# Altium PCB PCB1.PcbDoc (part 1 of 2)
Units mm, origin at the board's own origin, x right, y up, seen from the top; angles counter-clockwise.
Board outline 68.25 x 71.75 mm, 4 copper layers (Top Layer, Int1 (GND), Int2 (PWR), Bottom Layer), stack 1.369 mm thick; 58 components, 47 nets, 216 pads, 101 vias.
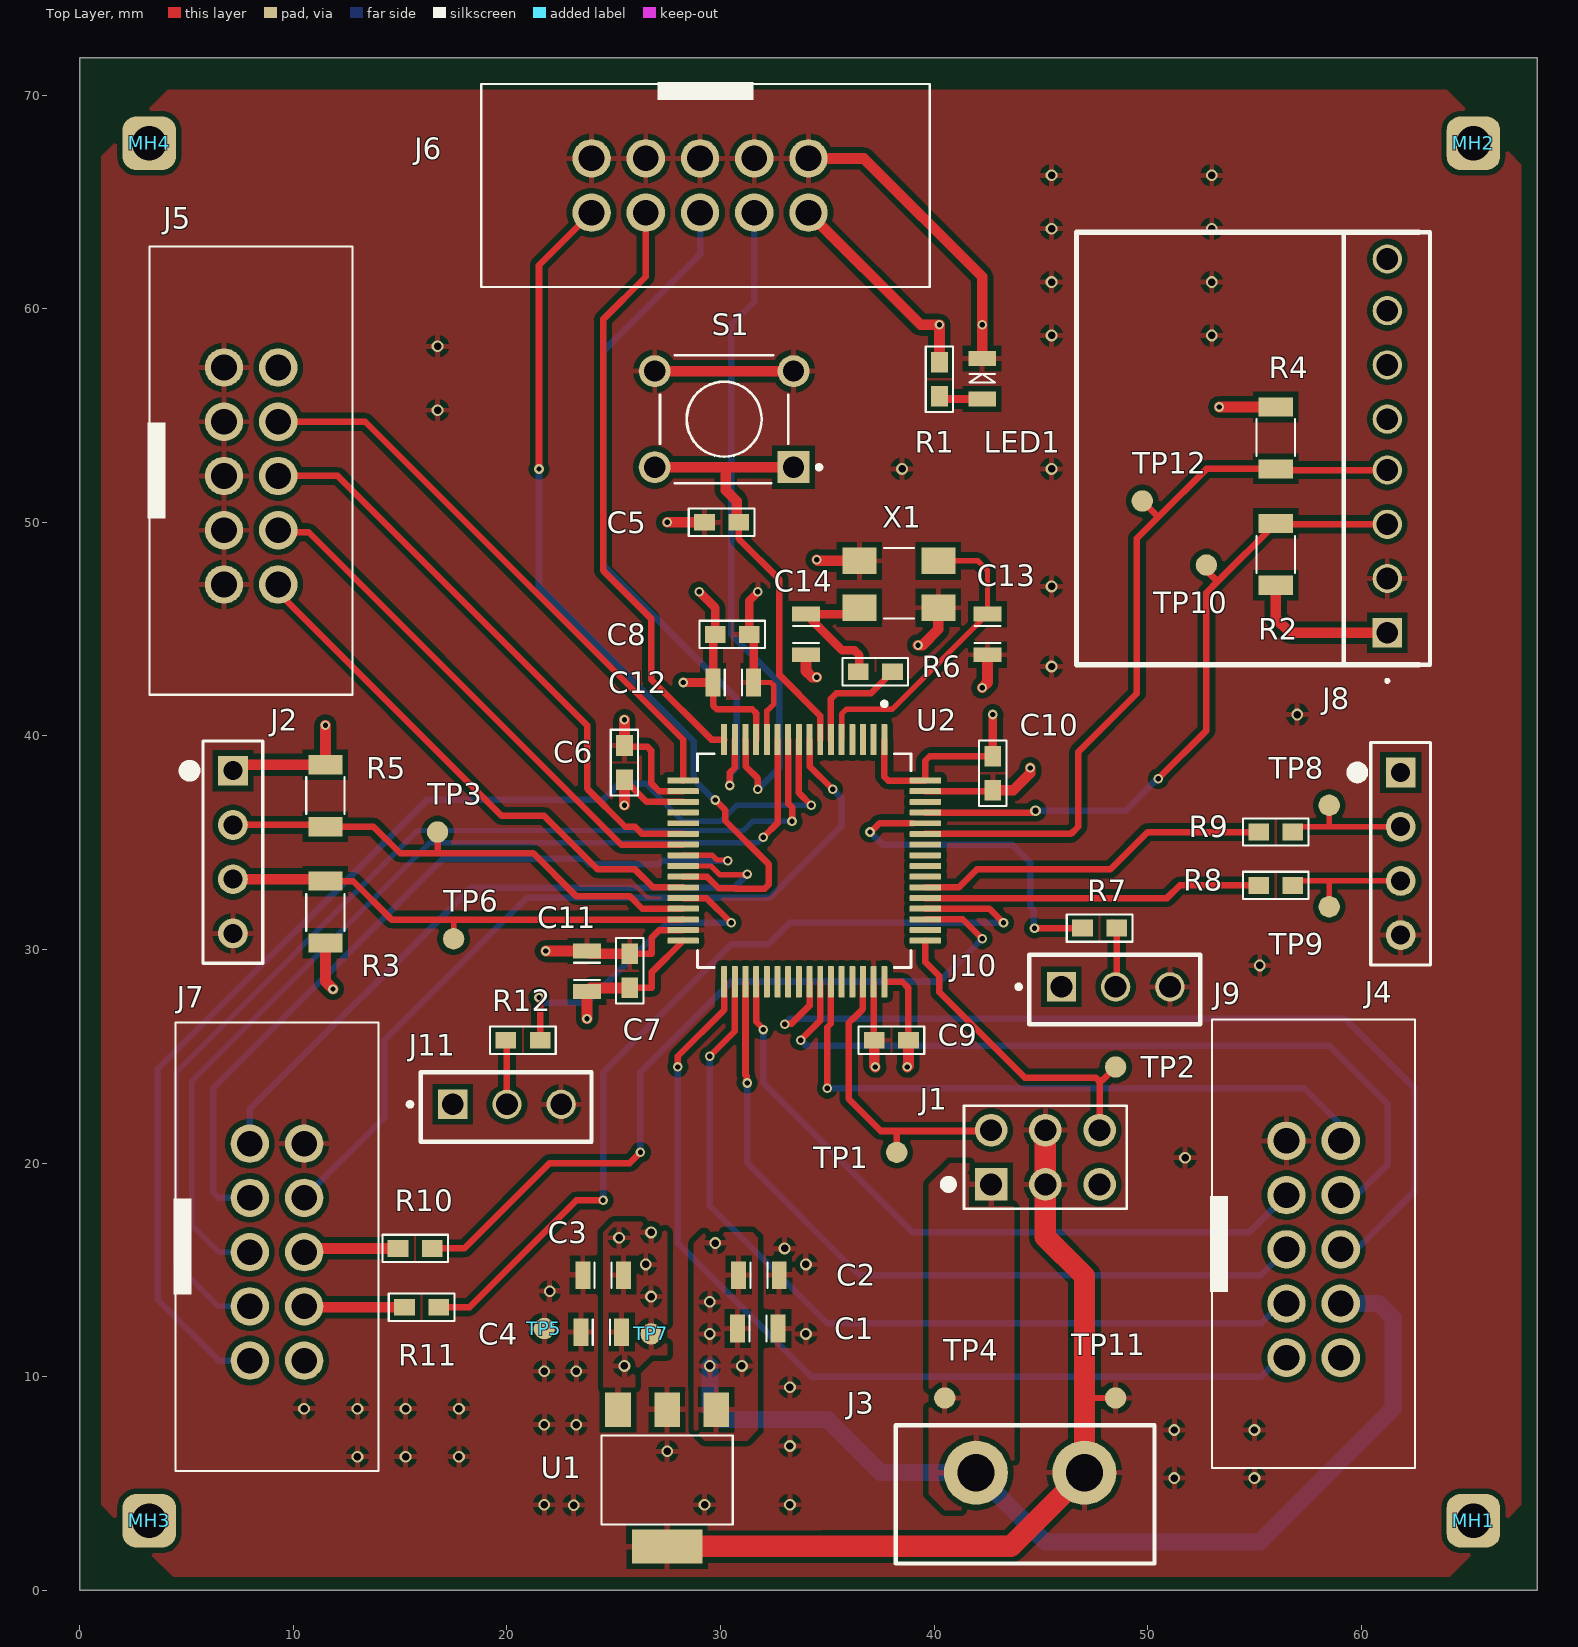
[diagram p0: Top Layer view]
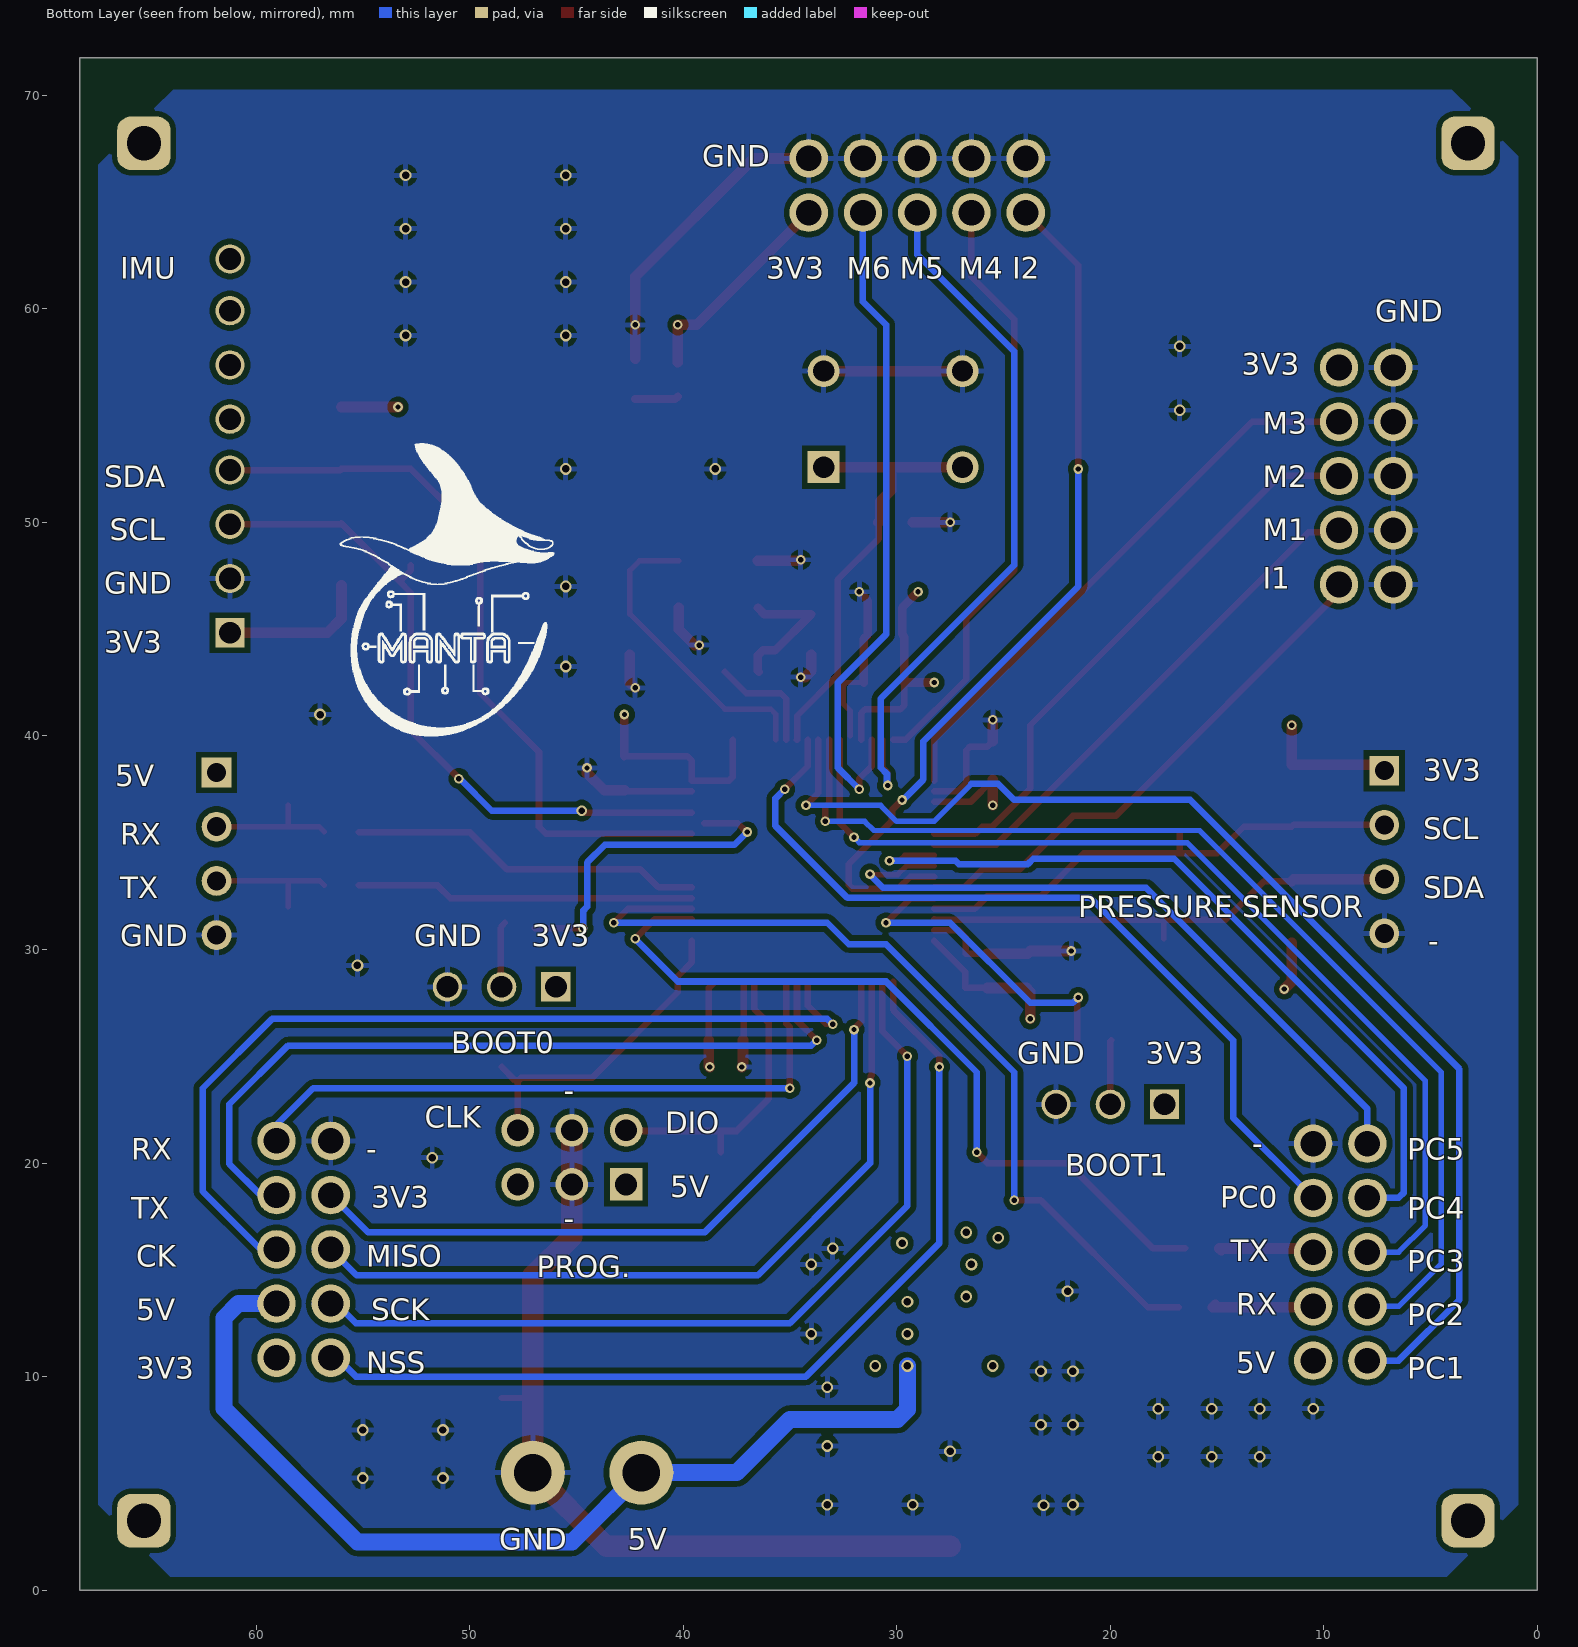
[diagram p1: Bottom Layer view, seen from below]
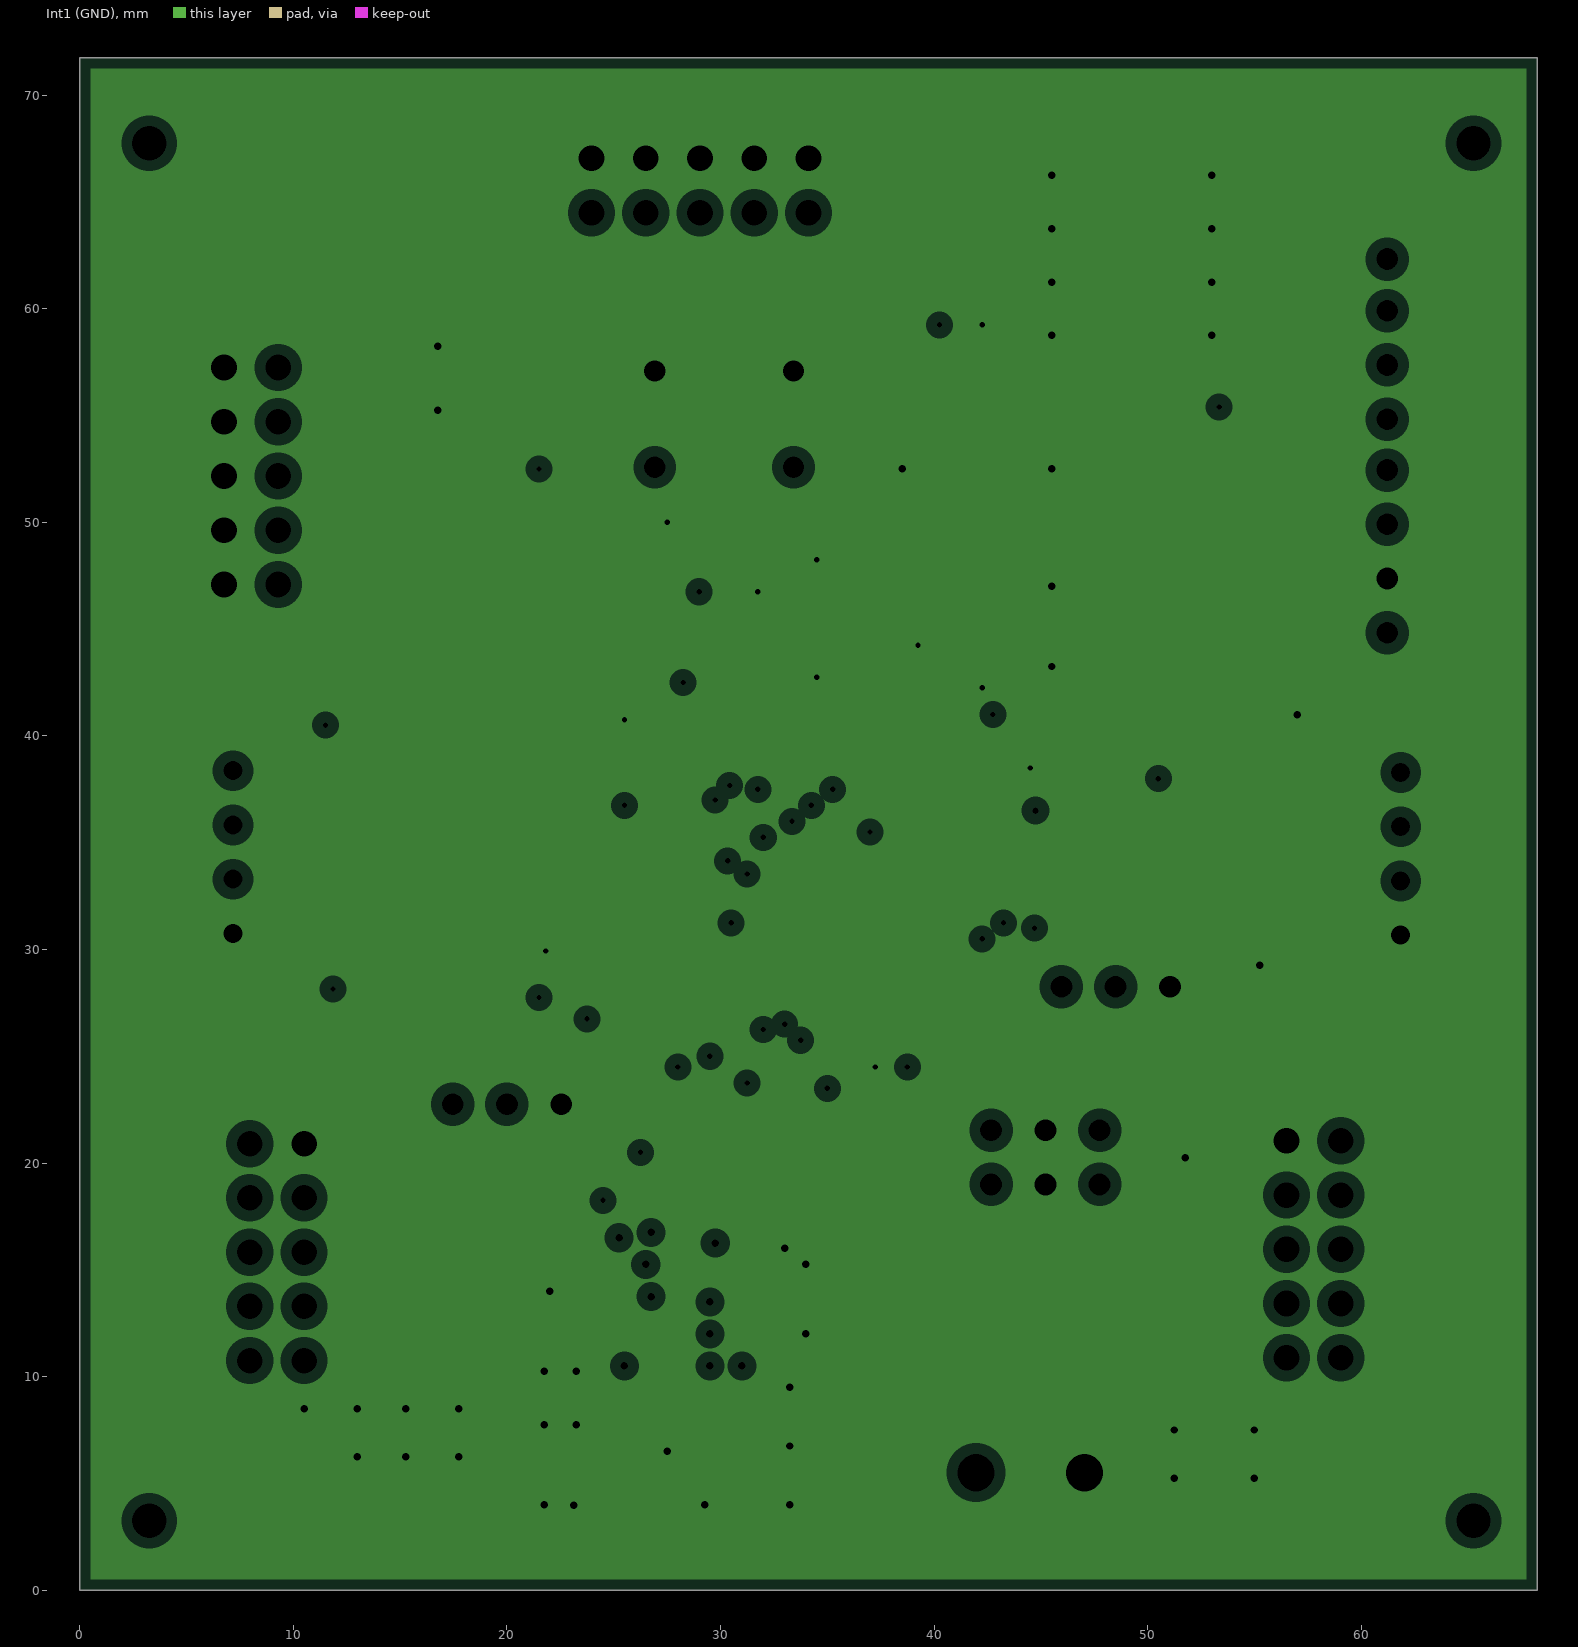
[diagram p2: Int1 (GND), clearances drawn from the general rule]
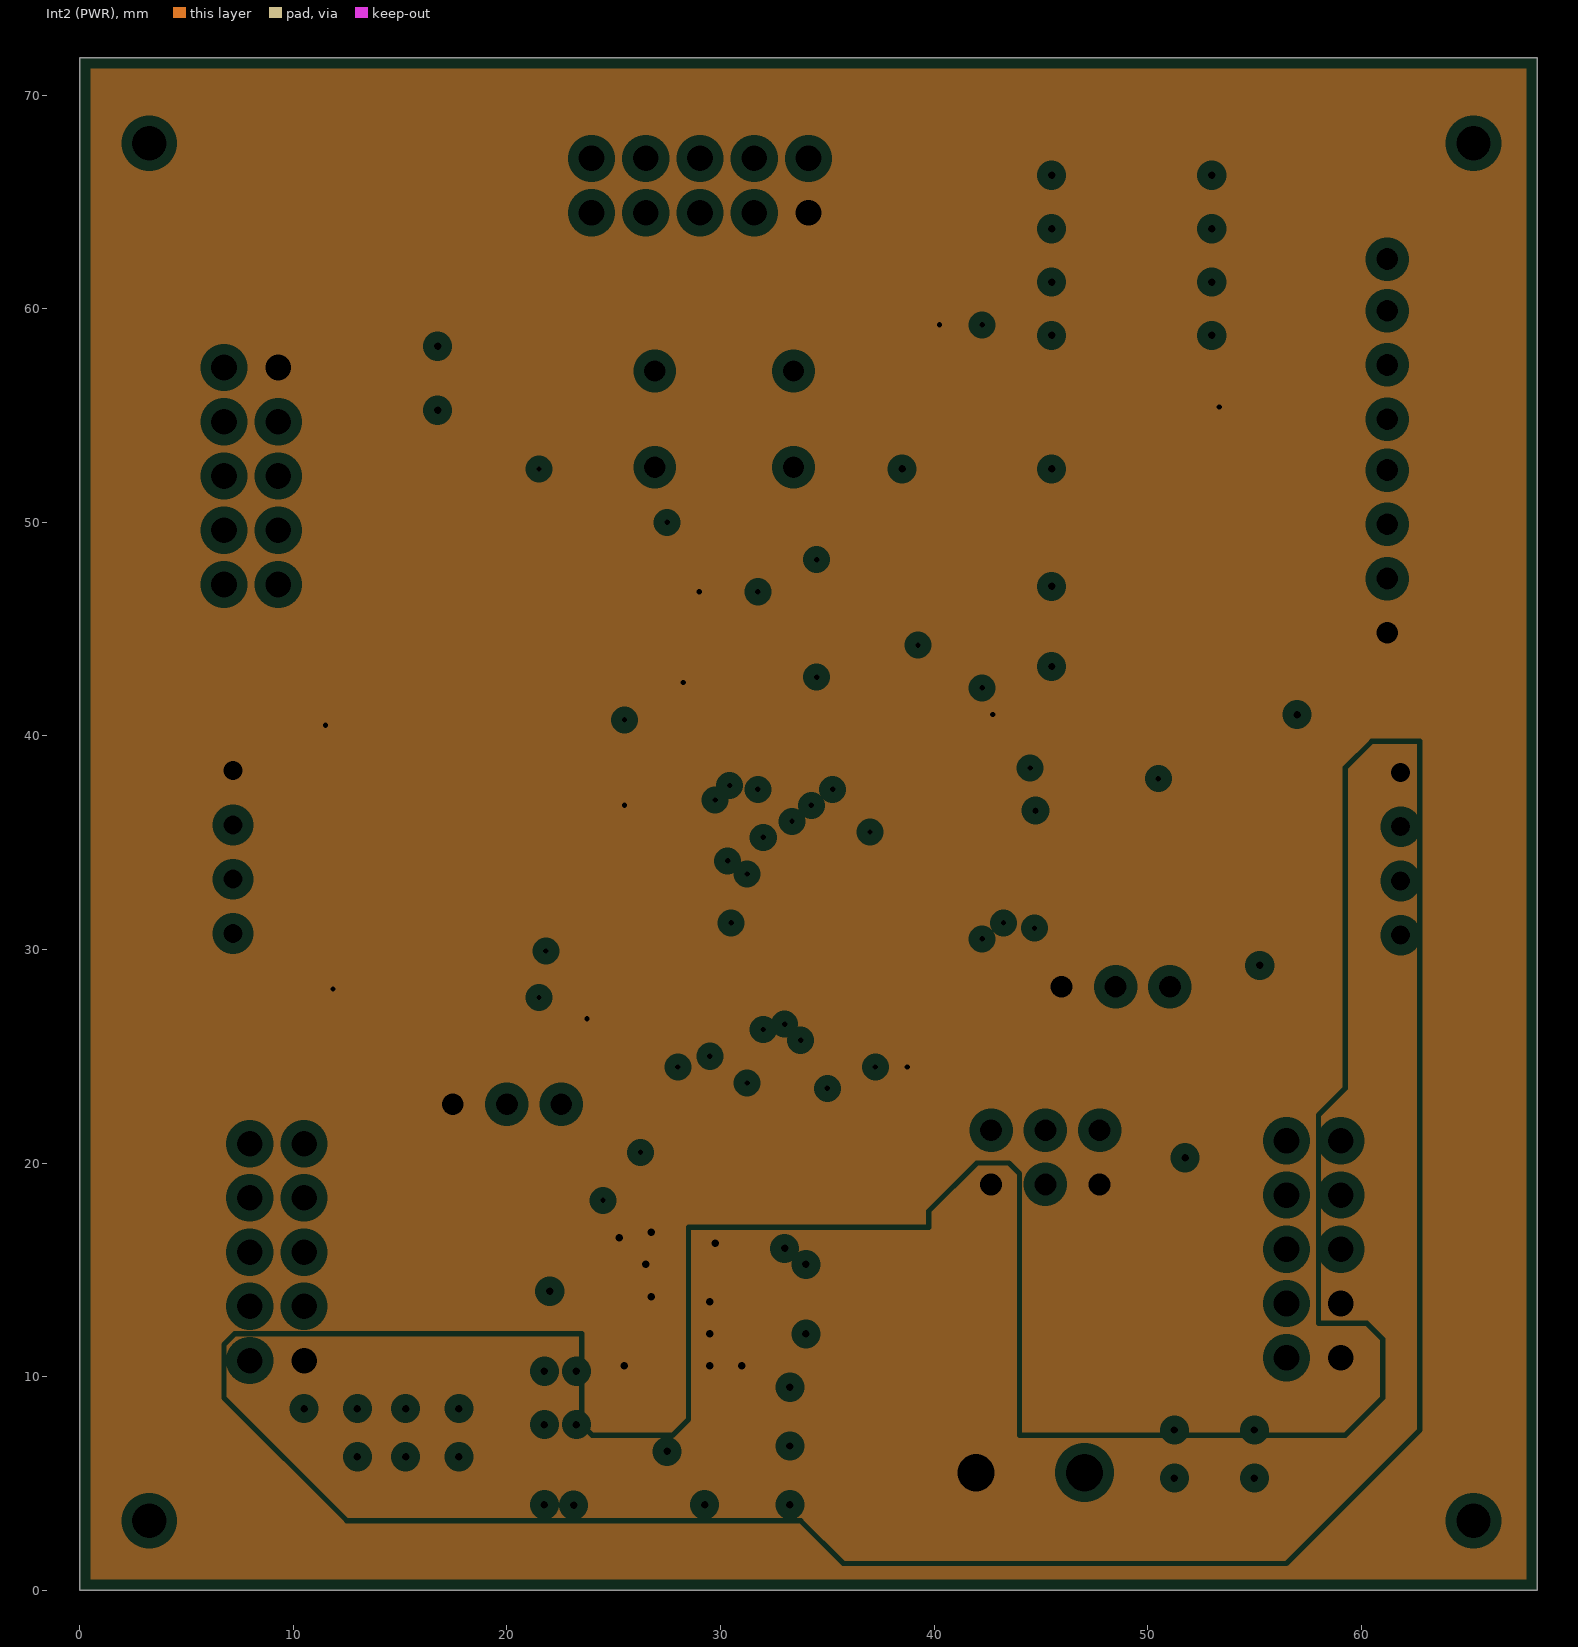
[diagram p3: Int2 (PWR), clearances drawn from the general rule]
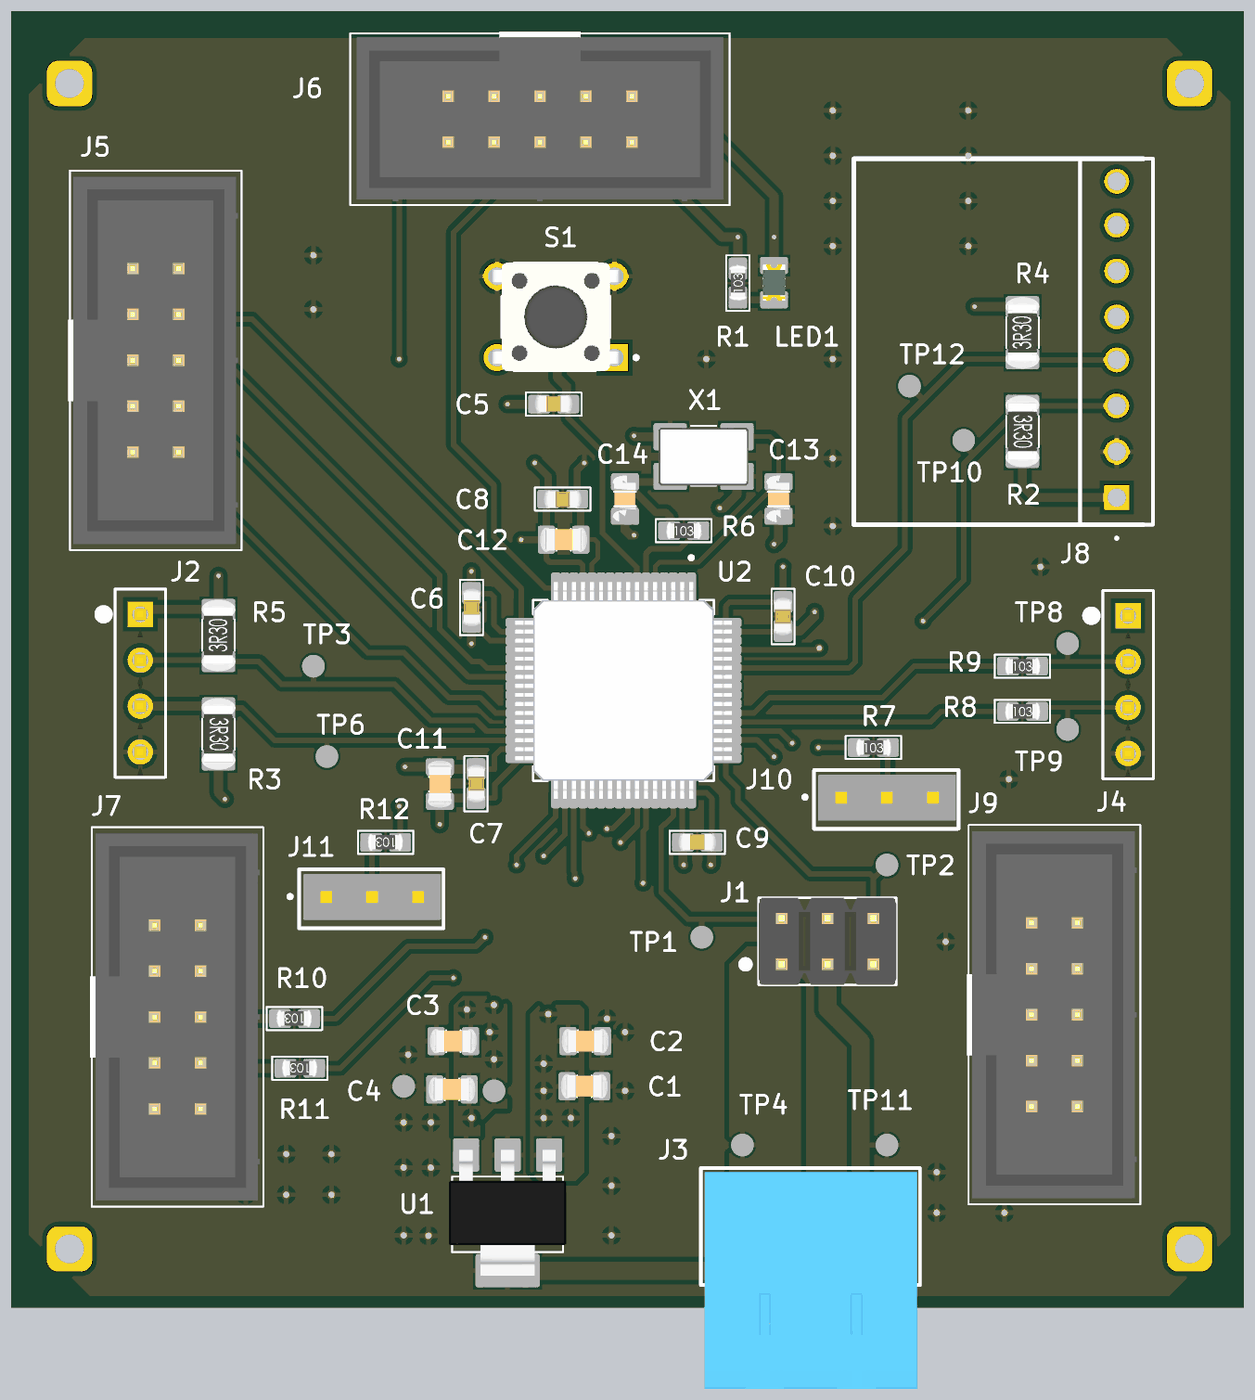
[diagram p4: 3D render of the assembled board from above, using the file's embedded part models]

## Layer stack, top to bottom
Top Solder: solder mask 0.0254, SM-001, Dk 4
Top Layer: signal copper 0.035
Dielectric 1: prepreg 0.1295, PP-017, Dk 4.3
Dielectric 2: prepreg 0.1295, PP-017, Dk 4.3
Int1 (GND): plane copper 0.035, net GND
Dielectric 3: core 0.7112, Core-039, Dk 4.8
Int2 (PWR): plane copper 0.035, net (Multiple Nets)
Dielectric 4: prepreg 0.1295, PP-017, Dk 4.3
Dielectric 5: prepreg 0.1295, PP-017, Dk 4.3
Bottom Layer: signal copper 0.035
Bottom Solder: solder mask 0.0254, SM-001, Dk 4

## Board outline
0,0 0,71.75 68.25,71.75 68.25,0

## Design rules (kind name [scope] priority, off if disabled: settings)
BoardOutlineClearance [All] p1: gap=0.3 ignorepadtopadclearanceinfootprint=FALSE
Clearance [All] p1: gap=0.254 ignorepadtopadclearanceinfootprint=TRUE except(0.15: Arc-Arc Arc-Track Arc-Text Track-Track Track-Text SMDPad-SMDPad SMDPad-Text THPad-Text Via-Text Fill-Text Poly-Text Region-Text Text-Text; 0.2: Arc-SMDPad Arc-Hole Track-SMDPad Track-Hole SMDPad-Hole THPad-Hole Via-Hole Fill-Hole Poly-Hole Region-Hole Text-Hole; 0.3: Arc-Via Track-Via; 0.35: Arc-THPad Track-THPad Via-Via; 0.55: THPad-THPad)
HoleSize [All] p1: absolutevalues=TRUE maxlimit=2.54 minlimit=0.2 maxpercent=80.000 minpercent=20.000
HoleToHoleClearance [All] p1: gap=0.5 allowstackedmicrovias=TRUE
MinimumSolderMaskSliver [All] p1: minsoldermaskwidth=0.1
NetAntennae [All] p1: netantennaetolerance=0.254
PasteMaskExpansion [All] p1: expansion=0.127
PlaneClearance [All] p1: clearance=0.508
PlaneConnect [All] p1: planeconnectstyle=Relief reliefexpansion=0.508 reliefentries=4 reliefconductorwidth=0.254 reliefairgap=0.254
PolygonConnect [All] p1: connectstyle=Relief reliefconductorwidth=0.254 reliefentries=4 polygonreliefangle="90 Angle" airgapwidth=0.254
RoutingCorners [All] p1: cornerstyle=45-Degree minsetback=2.032 maxsetback=2.032
RoutingVias [All] p1: holewidth=0.3 width=0.5 viastyle="Through Hole" minholewidth=0.25 minwidth=0.45 maxholewidth=0.711 maxwidth=1.27
SMDToCorner [All] p1: distance=150000
SilkToSolderMaskClearance [IsPad] p1: minsilkscreentomaskgap=0.102 clearancetoexposedcopper=TRUE
SolderMaskExpansion [All] p1: expansion=0.05 istentingtop=FALSE
UnRoutedNet [All] p1: checkbadconnections=TRUE
Width 5V [All] p1: maxlimit=2 minlimit=0.254 preferedwidth=1 minimp=50.000000 maximp=50.000000 favimp=50.000000
Width [All] p2: maxlimit=2 minlimit=0.254 preferedwidth=0.305 minimp=50.000000 maximp=50.000000 favimp=50.000000
20 further rules are at their usual default settings.

## Components (designator, comment, footprint, x,y, rotation, side; value= is the part's Value field where it differs from the comment)
C1 "CAP CER 1uF 0805" cap_0805 31.75,12.25 r180 top
C2 "CL21B104KBCNNNC" cap_0805 31.8,14.75 r180 top
C3 "CL21A475KAQNNNE" cap_0805 24.5,14.75 r0 top
C4 "CAP CER 1uF 0805" cap_0805 24.419,12.08 r0 top
C5 "CAP CER 100nF 0603" CAP_0603 30.05,50 r0 top
C6 "CAP CER 100nF 0603" CAP_0603 25.5,38.75 r270 top
C7 "CAP CER 100nF 0603" CAP_0603 25.75,29 r270 top
C8 "CAP CER 100nF 0603" CAP_0603 30.55,44.75 r180 top
C9 "CAP CER 100nF 0603" CAP_0603 38,25.75 r0 top
C10 "CAP CER 100nF 0603" CAP_0603 42.75,38.25 r90 top
C11 "CL21A475KAQNNNE" cap_0805 23.75,28.977 r270 top
C12 "CAP CER 1uF 0805" cap_0805 30.6,42.5 r180 top
C13 "C0805C300M5HAC7800" cap_0805 42.5,44.75 r90 top
C14 "C0805C300M5HAC7800" cap_0805 34,44.75 r90 top
J1 "67997-206HLF" "CONN 6 PINS 2 ROWS" 45.21,20.27 r0 top
J2 "61300411121" "CONN 4PINS 1 ROW" 7.169,38.37 r270 top
J3 "TERMINAL BLOCK, PLUGGABLE, 5.08," TBP01R1-508-02BE 44.5,5.5 r0 top
J4 "61300411121" "CONN 4PINS 1 ROW" 61.847,38.29 r270 top
J5 "302-S101" "CONN 10 PINS 2 ROWS" 8.02,52.424 r180 top
J6 "302-S101" "CONN 10 PINS 2 ROWS" 29.294,65.77 r90 top
J7 "302-S101" "CONN 10 PINS 2 ROWS" 9.23,16.084 r180 top
J8 "CONN 8 PIN" "CONN 8 PINS TH 2.54mm" 61.22,44.83 r270 top
J9 "302-S101" "CONN 10 PINS 2 ROWS" 57.77,16.214 r180 top
J10 "Conn Header HDR 3 POS 2.54mm" "CONN 3 PINS" 45.96,28.25 r90 top
J11 "Conn Header HDR 3 POS 2.54mm" "CONN 3 PINS" 17.46,22.75 r90 top
LED1 "LTST-C171GKT" "LED GREEN 0805" 42.25,56.723 r270 top
MH1 "MOUNTING HOLE" "MOUNTING HOLE" 65.25,3.25 r0 top
MH2 "MOUNTING HOLE" "MOUNTING HOLE" 65.25,67.75 r0 top
MH3 "MOUNTING HOLE" "MOUNTING HOLE" 3.25,3.25 r0 top
MH4 "MOUNTING HOLE" "MOUNTING HOLE" 3.25,67.75 r0 top
R1 "RC0603FR-7W100RL" RES_0603 40.25,56.7 r90 top
R2 "RC0603JR-074K7L" res_1206 56,48.5 r90 top
R3 "RC0603JR-074K7L" res_1206 11.5,31.75 r90 top
R4 "RC0603JR-074K7L" res_1206 56,53.95 r270 top
R5 "RC0603JR-074K7L" res_1206 11.5,37.2 r270 top
R6 "RC0603JR-070RL" RES_0603 37.25,43 r0 top
R7 "RES 10K OHM 0603" RES_0603 47.75,31 r0 top
R8 "RC0603JR-070RL" RES_0603 56,33 r0 top
R9 "RC0603JR-070RL" RES_0603 56,35.5 r0 top
R10 "RC0603JR-070RL" RES_0603 15.7,16 r180 top
R11 "RC0603JR-070RL" RES_0603 16,13.25 r180 top
R12 "RES 10K OHM 0603" RES_0603 20.75,25.75 r180 top
S1 "1825910-6" button 30.169,54.83 r180 top
TP1 "TEST_POINT" "TEST POINT" 38.25,20.5 r90 top
TP2 "TEST_POINT" "TEST POINT" 48.5,24.5 r90 top
TP3 "TEST_POINT" "TEST POINT" 16.75,35.5 r90 top
TP4 "TEST_POINT" "TEST POINT" 40.5,9 r90 top
TP5 "TEST_POINT" "TEST POINT" 21.75,12.25 r90 top
TP6 "TEST_POINT" "TEST POINT" 17.5,30.5 r90 top
TP7 "TEST_POINT" "TEST POINT" 26.75,12 r90 top
TP8 "TEST_POINT" "TEST POINT" 58.5,36.75 r90 top
TP9 "TEST_POINT" "TEST POINT" 58.5,32 r90 top
TP10 "TEST_POINT" "TEST POINT" 52.75,48 r90 top
TP11 "TEST_POINT" "TEST POINT" 48.5,9 r90 top
TP12 "TEST_POINT" "TEST POINT" 49.75,51 r90 top
U1 "AP7361-33E-13" AP7361-33E-13 27.5,5.25 r180 top
U2 "STM32L152RET6" STM32L152RET6 33.919,34.16 r270 top locked
X1 "ECS-160-20-30B-TR" CRYSTAL_ECS-160-20-30B-TR 38.35,47.1 r0 top

## Footprints (in the part's own frame and the unit in brackets; to place one, negate y for a bottom-side part, rotate by r counter-clockwise, add the part's x,y. Pads: shape width x height; smd on the part's side, far side on the other; paste and mask are expansions set on the pad)
AP7361-33E-13 [mm]
  rect 1.2x1.6 smd mask+0.05: 1(-2.3,-3.2) 2(0,-3.2) 3(2.3,-3.2)
  rect 3.3x1.6 smd mask+0.05: 2(0,3.2)
  silkscreen extent -3.07,-2 3.07,2.18, body extent -3.25,-3.48 3.25,3.48, height 1.65
button [mm]
  rect 1.498x1.498 hole 0.99: 1(-3.25,2.25)
  round 1.498 hole 0.99: 2(3.25,2.25) 3(-3.25,-2.25) 4(3.25,-2.25)
  silkscreen extent -4.54,-3 3,3, body extent -3.9,-3 3.9,3, height 5.01
CAP_0603 [mil]
  rect 38x31 smd mask+1.97: 1(-31.5,0) 2(31.5,0)
  silkscreen extent -60,-25 60,25, body extent -41,-20 41,21, height 35
cap_0805 [mm]
  rect 0.7x1.3 smd mask+0.05: 1(-0.95,0) 2(0.95,0)
  silkscreen extent -0.4,-0.6 0.4,0.6, body extent -1.3,-0.68 1.3,0.68, height 0.9
"CONN 3 PINS" [mm]
  rect 1.37x1.37 hole 1.02: 1(0,0)
  round 1.37 hole 1.02: 2(0,-2.54) 3(0,-5.08)
  silkscreen extent -1.75,-6.5 1.5,2.1, body extent -1.29,-6.35 1.25,1.27, height 9.27
"CONN 4PINS 1 ROW" [mil]
  rect 55x55 hole 35 mask+0: 1(0,0)
  round 55 hole 35 mask+0: 2(100,0) 3(200,0) 4(300,0)
  silkscreen extent -55,-90 355,55, body extent -50,-13 350,13, height 336
"CONN 6 PINS 2 ROWS" [mm]
  rect 1.53x1.53 hole 1.02: 1(-2.54,-1.27)
  round 1.53 hole 1.02: 2(-2.54,1.27) 3(0,-1.27) 4(0,1.27) 5(2.54,-1.27) 6(2.54,1.27)
  silkscreen extent -4.74,-2.41 3.81,2.41, body extent -3.81,-2.41 3.81,2.41, height 8.59
"CONN 8 PINS TH 2.54mm" [mm]
  rect 1.37x1.37 hole 1.02: 1(0,0)
  round 1.37 hole 1.02: 2(-2.54,0) 3(-5.08,0) 4(-7.62,0) 5(-10,0) 6(-12.54,0) 7(-15.08,0) 8(-17.5,0)
  silkscreen extent -18.75,-2.03 2.29,2
"CONN 10 PINS 2 ROWS" [mm]
  round 1.8 hole 1.2: 1(-1.27,5.334) 2(-1.27,2.794) 3(-1.27,0.254) 4(-1.27,-2.286) 5(-1.27,-4.826) 6(1.27,-4.826) 7(1.27,-2.286) 8(1.27,0.254) 9(1.27,2.794) 10(1.27,5.334)
  silkscreen extent -4.75,-10.5 4.84,10.5, body extent -4.55,-10.16 4.55,10.16, height 9
CRYSTAL_ECS-160-20-30B-TR [mm]
  rect 1.6x1.25 smd: 1(-1.85,-1.1) 2(1.85,-1.1) 3(1.85,1.1) 4(-1.85,1.1)
  silkscreen extent -0.7,-1.6 0.7,1.7, body extent -2.5,-1.6 2.5,1.6, height 0.85
"LED GREEN 0805" [mm]
  rect 0.7x1.3 smd mask+0.05: A(0.95,0) C(-0.95,0)
  silkscreen extent -0.23,-0.6 0.17,0.6, body extent -1,-0.62 1,0.63, height 1.1
"MOUNTING HOLE" [mm]
  rrect50% 2.5x2.5 hole 1.6 unplated mask+0.05: 1(0,0)
RES_0603 [mil]
  rect 38x31 smd mask+1.97: 1(-31.5,0) 2(31.5,0)
  silkscreen extent -60,-25 60,25, body extent -38,-19 39,19, height 20
res_1206 [mm]
  rect 0.9x1.6 smd mask+0.05: 0(-1.45,0) 1(1.45,0)
  silkscreen extent -0.87,-0.9 0.85,0.9, body extent -1.98,-0.94 1.98,0.94, height 0.55
STM32L152RET6 [mm]
  rrect25% 1.47x0.28 smd mask+0.05: 1(-5.67,3.75) 2(-5.67,3.25) 3(-5.67,2.75) 4(-5.67,2.25) 5(-5.67,1.75) 6(-5.67,1.25) 7(-5.67,0.75) 8(-5.67,0.25) 9(-5.67,-0.25) 10(-5.67,-0.75) 11(-5.67,-1.25) 12(-5.67,-1.75) 13(-5.67,-2.25) 14(-5.67,-2.75) 15(-5.67,-3.25) 16(-5.67,-3.75) 33(5.67,-3.75) 34(5.67,-3.25) 35(5.67,-2.75) 36(5.67,-2.25) 37(5.67,-1.75) 38(5.67,-1.25) 39(5.67,-0.75) 40(5.67,-0.25) 41(5.67,0.25) 42(5.67,0.75) 43(5.67,1.25) 44(5.67,1.75) 45(5.67,2.25) 46(5.67,2.75) 47(5.67,3.25) 48(5.67,3.75)
  rrect25% 0.28x1.47 smd mask+0.05: 17(-3.75,-5.67) 18(-3.25,-5.67) 19(-2.75,-5.67) 20(-2.25,-5.67) 21(-1.75,-5.67) 22(-1.25,-5.67) 23(-0.75,-5.67) 24(-0.25,-5.67) 25(0.25,-5.67) 26(0.75,-5.67) 27(1.25,-5.67) 28(1.75,-5.67) 29(2.25,-5.67) 30(2.75,-5.67) 31(3.25,-5.67) 32(3.75,-5.67) 49(3.75,5.67) 50(3.25,5.67) 51(2.75,5.67) 52(2.25,5.67) 53(1.75,5.67) 54(1.25,5.67) 55(0.75,5.67) 56(0.25,5.67) 57(-0.25,5.67) 58(-0.75,5.67) 59(-1.25,5.67) 60(-1.75,5.67) 61(-2.25,5.67) 62(-2.75,5.67) 63(-3.25,5.67) 64(-3.75,5.67)
  silkscreen extent -7.44,-5 5,5, body extent -6,-6 6,6, height 1.63
TBP01R1-508-02BE [mm]
  round 3 hole 1.75: 1(-2.54,0) 2(2.54,0)
  silkscreen extent -6.3,-4.25 5.82,2.22, body extent -6.1,-10 5.66,2, height 8.5
"TEST POINT" [mm]
  round 1 smd mask+0.05: 1(0,0)

## Part data
C1 C4 C12: "0805 0.1 uF ±10 % Tolerance 50 V X7R Multilayer Ceramic Capacitors", Capacitance=1uF, Case Code (Metric)=2012, Case Code (Imperial)=0805, Dielectric=X7R, Manufacturer=Samsung, Manufacturer Part Number=CL21B104KBFNNNE, Max Operating Temperature=125°C, Min Operating Temperature=-55°C, Package Quantity=1, Supplier Part Number 1=1276-1180-1-ND, Tolerance=10%, Voltage Rating=50V, Case/Package=0805, Category="Ceramic Capacitors", ComponentLink1Description=https://datasheet.ciiva.com/25736/cl21b104kbfnnne-25736721.pdf?src-supplier=Digi-Key, ComponentLink1URL=https://datasheet.ciiva.com/25736/cl21b104kbfnnne-25736721.pdf?src-supplier=Digi-Key, Construction=Flat, Contact Plating=Tin, Depth=1.25mm, Designed by=Hamit, Height=1.25mm, Lead Free="Lead Free", Length=2mm, Mount="Surface Mount", Packaging="Tape and Reel", Pricing 1="1=0,10000, 10=0,04900, 50=0,02700, 100=0,02200, 500=0,01574, 1000=0,01237 (USD)", Radiation Hardening=No, RoHS=Yes, RoHS Compliant=Yes, Series=CL, Supplier 1=Digi-Key, Thickness=0.053inch, Voltage Rating (DC)=50V, Width=0.049inch
C2: library part "CAP cer 100nF 0805", "Samsung Electro-Mechanics 100nF Multilayer Ceramic Capacitor (MLCC) 50 V 10% X7R dielectric CL max op. temp. +125C", Capacitance=100nF, Case Code (Metric)=2012, Case Code (Imperial)=0805, Dielectric=X7R, Manufacturer=Samsung, Max Operating Temperature=125°C, Min Operating Temperature=-55°C, Supplier Part Number 1=1276-1003-1-ND, Tolerance=10%, Voltage=50V, Case/Package=0805, Category="Ceramic Capacitors", ComponentLink1Description=https://datasheet.ciiva.com/25710/cl21b104kbcnnnc-25710182.pdf?src-supplier=Digi-Key, ComponentLink1URL=https://datasheet.ciiva.com/25710/cl21b104kbcnnnc-25710182.pdf?src-supplier=Digi-Key, ComponentLink2Description=https://datasheet.ciiva.com/29199/454152-da-01-en-vs-kondensator-0805-29199814.pdf?src-supplier=Conrad, ComponentLink2URL=https://datasheet.ciiva.com/29199/454152-da-01-en-vs-kondensator-0805-29199814.pdf?src-supplier=Conrad, Construction=Flat, Contact Plating=Tin, Depth=1.25mm, Designed by=Hamit, Height=0.85mm, Lead Free="Lead Free", Length=2mm, Manufacturer Part Number=CL21B104KBCNNNC, Material=Ceramic, Mount="Surface Mount", Packaging="Tape and Reel", Pricing 1="1=0,10000, 10=0,05000, 50=0,02740, 100=0,02240, 500=0,01598, 1000=0,01256 (USD)", Radiation Hardening=No, RoHS=Yes, RoHS Compliant=Yes, Series=CL, Supplier 1=Digi-Key, Thickness=0.037inch, Voltage Rating=50V, Voltage Rating (DC)=50V, Width=0.049inch
C3: library part CAP_0805_4.7uF, "SAMSUNG ELECTRO-MECHANICS - CL21A475KAQNNNE - SMD Multilayer Ceramic Capacitor, 4.7 µF, 25 V, 0805 [2012 Metric], ± 10%, X5R, CL Series", Capacitance=4.7uF, Case Code (Metric)=2012, Case Code (Imperial)=0805, Dielectric=X5R, Manufacturer=Samsung, Max Operating Temperature=85°C, Min Operating Temperature=-55°C, Package Quantity=1, Supplier Part Number 1=187-CL21A475KAQNNNE, Tolerance=10%, Voltage Rating=25V, Case/Package=0805, Category="Ceramic Capacitors", ComponentLink1Description=https://datasheet.ciiva.com/25798/cl21a475kaqnnne-25798882.pdf?src-supplier=Digi-Key, ComponentLink1URL=https://datasheet.ciiva.com/25798/cl21a475kaqnnne-25798882.pdf?src-supplier=Digi-Key, Construction=Flat, Depth=1.25mm, Designed by=Hamit, Height=1.25mm, Lead Free="Lead Free", Length=2mm, Manufacturer Part Number=CL21A475KAQNNNE, Mount="Surface Mount", Packaging="Tape and Reel", Pricing 1="1=0,12000, 10=0,04800, 50=0,04800, 100=0,03900, 500=0,02800, 1000=0,02300, 2000=0,02000, 10000=0,02000 (USD)", Radiation Hardening=No, RoHS=Yes, RoHS Compliant=Yes, Series=CL, Stock 1=975, Supplier 1=Mouser, Thickness=0.055inch, Voltage Rating (DC)=25V, Width=0.049inch
C5 C6 C7 C8 C9 C10: "KEMET - C0603C104K5RACTU - SMD Multilayer Ceramic Capacitor, 0.1 µF, 50 V, 0603 [1608 Metric], ± 10%, X7R, C Series KEMET", Capacitance=100nF, Case Code (Metric)=1608, Case Code (Imperial)=0603, Dielectric=X7R, Dielectric Material=Ceramic, Manufacturer=KEMET, Manufacturer Part Number=C0603C104K5RACTU, Max Operating Temperature=125°C, Min Operating Temperature=-55°C, Package Quantity=1, Supplier Part Number 1=399-5089-6-ND, Tolerance=10%, Voltage=50V, Case/Package=0603, Category="Ceramic Capacitors", ComponentLink1Description=https://datasheet.ciiva.com/7823/kem-c1002-x7r-smd-7823591.pdf?src-supplier=Element14, ComponentLink1URL=https://datasheet.ciiva.com/7823/kem-c1002-x7r-smd-7823591.pdf?src-supplier=Element14, ComponentLink2Description=https://datasheet.ciiva.com/14602/70095383-14602583.pdf?src-supplier=Allied+Electronics, ComponentLink2URL=https://datasheet.ciiva.com/14602/70095383-14602583.pdf?src-supplier=Allied+Electronics, ComponentLink3Description=https://datasheet.ciiva.com/5999/kem-c1002-x7r-smd-5999400.pdf?src-supplier=Farnell, ComponentLink3URL=https://datasheet.ciiva.com/5999/kem-c1002-x7r-smd-5999400.pdf?src-supplier=Farnell, ComponentLink4Description=https://datasheet.ciiva.com/7823/kem-c1002-x7r-smd-7823592.pdf?src-supplier=Element14, ComponentLink4URL=https://datasheet.ciiva.com/7823/kem-c1002-x7r-smd-7823592.pdf?src-supplier=Element14, ComponentLink5Description=https://datasheet.ciiva.com/28645/1851736-28645640.pdf?src-supplier=Element14, ComponentLink5URL=https://datasheet.ciiva.com/28645/1851736-28645640.pdf?src-supplier=Element14, ComponentLink6Description=https://datasheet.ciiva.com/14585/70095383-14585209.pdf?src-supplier=Allied+Electronics, ComponentLink6URL=https://datasheet.ciiva.com/14585/70095383-14585209.pdf?src-supplier=Allied+Electronics, Contact Plating=Tin,Matte, Depth=0.8mm, Designed by=Hamit, Dissipation Factor=2.5%, Height=0.8mm, Lead Pitch=0.7mm, Length=0.063inch, Mount="Surface Mount", Number of Pins=2, Packaging="Tape and Reel", Pricing 1="1=0,12000, 10=0,08900, 50=0,04840, 100=0,03940, 500=0,02818, 1000=0,02214 (USD)", Radiation Hardening=No, REACH SVHC="No SVHC", RoHS=Yes, RoHS Compliant=Yes, Series="SMD Comm X7R", Stock 1=4486940, Supplier 1=Digi-Key, Termination=SMD/SMT, Thickness=0.034inch, Voltage Rating=50V, Voltage Rating (DC)=50V, Width=0.031inch
C11: library part "CAP CER 4.7 uF", "SAMSUNG ELECTRO-MECHANICS - CL21A475KAQNNNE - SMD Multilayer Ceramic Capacitor, 4.7 µF, 25 V, 0805 [2012 Metric], ± 10%, X5R, CL Series", Capacitance=4.7uF, Case Code (Metric)=2012, Case Code (Imperial)=0805, Dielectric=X5R, Manufacturer=Samsung, Max Operating Temperature=85°C, Min Operating Temperature=-55°C, Package Quantity=1, Supplier Part Number 1=1276-1244-1-ND, Tolerance=10%, Voltage Rating=25V, Case/Package=0805, Category="Ceramic Capacitors", ComponentLink1Description=https://datasheet.ciiva.com/25798/cl21a475kaqnnne-25798882.pdf?src-supplier=Digi-Key, ComponentLink1URL=https://datasheet.ciiva.com/25798/cl21a475kaqnnne-25798882.pdf?src-supplier=Digi-Key, Construction=Flat, Depth=1.25mm, Designed by=Hamit, Height=1.25mm, Lead Free="Lead Free", Length=2mm, Manufacturer Part Number=CL21A475KAQNNNE, Mount="Surface Mount", Packaging="Tape and Reel", Pricing 1="1=0,12000, 10=0,08300, 50=0,04700, 100=0,03890, 500=0,02728, 1000=0,02259 (USD)", Radiation Hardening=No, RoHS=Yes, RoHS Compliant=Yes, Series=CL, Supplier 1=Digi-Key, Thickness=0.055inch, Voltage Rating (DC)=25V, Width=0.049inch
C13 C14: library part "CAP CER 30 PF 0805", "Cap Cer 0805 30PF 50V Ultra Stab", Capacitance=30pF, Manufacturer=KEMET, Supplier Part Number 1=399-C0805C300M5HAC7800CT-ND, Category="Ceramic Capacitors", Manufacturer Part Number=C0805C300M5HAC7800, Pricing 1="1=0,10000, 10=0,07300, 50=0,03960, 100=0,03230, 500=0,02310, 1000=0,01815 (USD)", RoHS=No, Stock 1=17957, Supplier 1=Digi-Key
J1: library part "CONN 6 PIN 2 ROWS", "Conn Unshrouded Header HDR 6 POS 2.54mm Solder ST Top Entry Thru-Hole BergStik® Bulk", Manufacturer=ICC, Supplier Part Number 1=33M7873, Category="Headers and Wire Housings", Manufacturer Part Number=67997-206HLF, Pricing 1="1=0,46900, 10=0,32500, 25=0,32100, 50=0,31700, 100=0,31300, 250=0,29200, 500=0,27200, 1000=0,23100, 2500=0,16100, 5000=0,15200, 10000=0,13400 (USD)", RoHS=No, Stock 1=424, Supplier 1=Newark
J2 J4: library part "CONN 4 PINS 1 ROW", "CONN HEADER 4 POS 2.54", Color=Black, Manufacturer="Wurth Electronics", Supplier Part Number 1=732-5317-ND, Category="Headers and Wire Housings", ComponentLink1Description=http://www.farnell.com/cad/1737268.pdf?src-supplier=Element14, ComponentLink1URL=http://www.farnell.com/cad/1737268.pdf?src-supplier=Element14, ComponentLink2Description=https://katalog.we-online.de/em/datasheet/6130xx11121.pdf?src-supplier=Digi-Key, ComponentLink2URL=https://katalog.we-online.de/em/datasheet/6130xx11121.pdf?src-supplier=Digi-Key, Connector Type="Male Pin", Contact Material=Copper, Contact Mating Length=0.236inch, Contact Plating=Gold, Gender=Male, Lead Free="Lead Free", Manufacturer Part Number=61300411121, Mount="Through Hole", Number of Contacts=4, Number of Positions=4, Number of Rows=1, Packaging=Bulk, Pitch=0.1inch, Pricing 1="1=0,19000, 10=0,15800, 25=0,13120, 50=0,11000, 100=0,09900, 1000=0,09100 (USD)", REACH SVHC=Unknown, RoHS=Yes, RoHS Compliant=Yes, Stock 1=1627, Supplier 1=Digi-Key, Termination=Solder
J3: library part "TERMINAL BLOCK TBP01R1-508-02BE", "Conn Shrouded Header HDR 2 POS 5.08mm Solder RA Side Entry Thru-Hole Bag", Manufacturer=CUI, Manufacturer Part Number=TBP01R1-508-02BE, Supplier Part Number 1=102-6406-ND, Designed by=Hamit, Pricing 1="1=0,56000, 10=0,29600, 25=0,20960, 50=0,17840, 100=0,17220, 250=0,14560, 500=0,13464, 1000=0,11898, 5000=0,09080 (USD)", RoHS=Yes, Stock 1=4344, Supplier 1=Digi-Key
J5 J6 J7 J9: library part "CONN 10 PINS", "10 pin 接头，有罩 连接器 0.100&quot;（2.54mm） 通孔 金", Color=Black, Manufacturer="On-Shore Technology", Supplier Part Number 1=ED1543-ND, Category=Connectors, ComponentLink1Description=https://datasheet.ciiva.com/732/302-sxxx-732946.pdf?src-supplier=Digi-Key, ComponentLink1URL=https://datasheet.ciiva.com/732/302-sxxx-732946.pdf?src-supplier=Digi-Key, Connector Type="Male Pin", Contact Plating=Gold, Manufacturer Part Number=302-S101, Mount="Through Hole", Number of Positions=10, Number of Rows=2, Packaging=Tray, Pitch=0.1inch, Pricing 1="1=0,29000, 10=0,24800, 100=0,19290, 500=0,16538, 1000=0,13781, 5000=0,11812, 10000=0,11025 (USD)", RoHS=Yes, Row Spacing=0.1inch, Stock 1=5852, Supplier 1=Digi-Key, Termination=Solder
J10 J11: library part "CONN 3 PINS", "Conn Unshrouded Header HDR 3 POS 2.54mm Solder ST Top Entry Thru-Hole BergStik® Bulk", Manufacturer="Amphenol ICC / FCI", Manufacturer Part Number=68001-203HLF, Supplier Part Number 1=609-3470-ND, Category="Headers and Wire Housings", ComponentLink1Description=http://components.arrow.com/part/dataview/0323_00900381?src-supplier=Arrow+Europe, ComponentLink1URL=http://components.arrow.com/part/dataview/0323_00900381?src-supplier=Arrow+Europe, ComponentLink2Description=http://uk.rs-online.com/webdocs/1450/0900766b81450c64.pdf?src-supplier=RSComponents, ComponentLink2URL=http://uk.rs-online.com/webdocs/1450/0900766b81450c64.pdf?src-supplier=RSComponents, ComponentLink3Description=http://www.farnell.com/datasheets/1914865.pdf?src-supplier=Farnell, ComponentLink3URL=http://www.farnell.com/datasheets/1914865.pdf?src-supplier=Farnell, ComponentLink4Description=http://www.farnell.com/datasheets/1914865.pdf?src-supplier=Element14, ComponentLink4URL=http://www.farnell.com/datasheets/1914865.pdf?src-supplier=Element14, ComponentLink5Description=http://www.farnell.com/datasheets/1914865.pdf?src-supplier=Newark, ComponentLink5URL=http://www.farnell.com/datasheets/1914865.pdf?src-supplier=Newark, ComponentLink6Description=https://cdn.amphenol-icc.com/media/wysiwyg/files/drawing/68000.pdf?src-supplier=Digi-Key, ComponentLink6URL=https://cdn.amphenol-icc.com/media/wysiwyg/files/drawing/68000.pdf?src-supplier=Digi-Key, ComponentLink7Description=http://www.mouser.com/ds/2/154/68000-274373.pdf?src-supplier=Mouser, ComponentLink7URL=http://www.mouser.com/ds/2/154/68000-274373.pdf?src-supplier=Mouser, ComponentLink8Description=http://portal.fciconnect.com/Comergent/fci/drawing/68000.pdf?src-supplier=Avnet, ComponentLink8URL=http://portal.fciconnect.com/Comergent/fci/drawing/68000.pdf?src-supplier=Avnet, ComponentLink9Description=http://components.arrow.com/part/dataview/41914271S7424575N8314?src-supplier=Arrow+Electronics, ComponentLink9URL=http://components.arrow.com/part/dataview/41914271S7424575N8314?src-supplier=Arrow+Electronics, ComponentLink10Description=http://portal.fciconnect.com/Comergent/fci/drawing/68000.pdf?src-supplier=Avnet+Europe, ComponentLink10URL=http://portal.fciconnect.com/Comergent/fci/drawing/68000.pdf?src-supplier=Avnet+Europe, ComponentLink11Description=https://www.alliedelec.com/m/d/5c9a93367e9d0f191689c8d93ba26bad.pdf?src-supplier=Allied+Electronics, ComponentLink11URL=https://www.alliedelec.com/m/d/5c9a93367e9d0f191689c8d93ba26bad.pdf?src-supplier=Allied+Electronics, Pricing 1="1=0,27000, 10=0,22600, 100=0,17360, 500=0,14692, 1000=0,12020, 5000=0,10685, 10000=0,09683 (USD)", RoHS=No, Stock 1=4963, Supplier 1=Digi-Key
LED1: library part "LED GREEN 0805", "Green 0805 130 º Min 5 mcd Typical 12 mcd Water Clear Lens SMT LED", Case Code (Metric)=2012, Case Code (Imperial)=0805, Color=Green, Forward Current=30mA, Forward Voltage=2.1V, Lens Color=Colorless, Manufacturer="Vishay Lite-On", Max Operating Temperature=85°C, Min Operating Temperature=-55°C, Package Quantity=1, Power Dissipation=100mW, Reverse Voltage=5V, Supplier Part Number 1=160-1423-2-ND, Test Current=10mA, Case/Package=0805, Category=LEDs, ComponentLink1Description=https://datasheet.ciiva.com/2110/ltst-c171gkt-2110000.pdf?src-supplier=Digi-Key, ComponentLink1URL=https://datasheet.ciiva.com/2110/ltst-c171gkt-2110000.pdf?src-supplier=Digi-Key, ComponentLink2Description=https://datasheet.ciiva.com/11773/0900766b80dc0296-11773991.pdf?src-supplier=RSComponents, ComponentLink2URL=https://datasheet.ciiva.com/11773/0900766b80dc0296-11773991.pdf?src-supplier=RSComponents, ComponentLink3Description=https://datasheet.ciiva.com/12400/lite-on-ltst-c171gkt-190133-12400647.pdf?src-supplier=Mouser, ComponentLink3URL=https://datasheet.ciiva.com/12400/lite-on-ltst-c171gkt-190133-12400647.pdf?src-supplier=Mouser, ComponentLink4Description=https://datasheet.ciiva.com/2110/ltst-c171gkt-2110001.pdf?src-supplier=Digi-Key, ComponentLink4URL=https://datasheet.ciiva.com/2110/ltst-c171gkt-2110001.pdf?src-supplier=Digi-Key, ComponentLink5Description=https://datasheet.ciiva.com/2110/ltst-c171gkt-2110002.pdf?src-supplier=Digi-Key, ComponentLink5URL=https://datasheet.ciiva.com/2110/ltst-c171gkt-2110002.pdf?src-supplier=Digi-Key, ComponentLink6Description=https://datasheet.ciiva.com/16396/ltst-c171gkt-16396549.pdf?src-supplier=Future+Electronics, ComponentLink6URL=https://datasheet.ciiva.com/16396/ltst-c171gkt-16396549.pdf?src-supplier=Future+Electronics, Depth=1.25mm, Designed by=Hamit, Dominant Wavelength=569nm, Height=0.8mm, Lead Free="Lead Free", Length=2mm, Lens Style=Diffused,Colorless,Rectangular,Clear, Lens Transparency=Clear, Luminous Intensity=12mcd, Manufacturer Part Number=LTST-C171GKT, Mount="Surface Mount", Number of Elements=1, Number of LEDs=1, Number of Pins=2, Packaging="Tape and Reel", Power Rating=100mW, Pricing 1="6000=0,00000 (USD)", Radiation Hardening=No, RoHS=Yes, RoHS Compliant=Yes, Series="CHIPLED 0805", Supplier 1=Digi-Key, Viewing Angle=130°, Wavelength=585nm, Width=1.25mm, Illumination Color=Green
R1: library part "RES 100 OHM 0603", "RESISTOR, 0603, 100R, 1%", Case Code (Metric)=1608, Case Code (Imperial)=0603, Manufacturer=Yageo, Power Rating=100mW, Resistance=100R, Resistance Tolerance=1%, Resistor Type="Thick Film", Supplier Part Number 1=13-RC0603FR-7W100RLCT-ND, Temperature Coefficient=100ppm/°C, Voltage Rating=50V, Case/Package=0603, Category="Chip SMD Resistors", ComponentLink1Description=https://datasheet.ciiva.com/22704/1675737-22704044.pdf?src-supplier=Element14, ComponentLink1URL=https://datasheet.ciiva.com/22704/1675737-22704044.pdf?src-supplier=Element14, ComponentLink2Description=https://datasheet.ciiva.com/7746/1675737-7746414.pdf?src-supplier=Element14, ComponentLink2URL=https://datasheet.ciiva.com/7746/1675737-7746414.pdf?src-supplier=Element14, Manufacturer Part Number=RC0603FR-7W100RL, Number of Pins=2, Packaging="Cut Tape", Pricing 1="1=0,10000, 10=0,03600, 100=0,01450, 1000=0,00652, 2500=0,00566 (USD)", REACH SVHC=Unknown, RoHS=Yes, RoHS Compliant=Yes, Series=RC0603, Stock 1=23140, Supplier 1=Digi-Key, Tolerance=1%, Voltage Rating (DC)=50V
R2 R3 R4 R5: library part "RES 4K7 OHM", "Res Thick Film 0603 4.7K Ohm 5% 0.1W(1/10W) ±100ppm/C Molded SMD Paper T/R", Case Code (Metric)=1608, Case Code (Imperial)=0603, Manufacturer=Yageo, Max Operating Temperature=155°C, Max Power Dissipation=100mW, Min Operating Temperature=-55°C, Resistance=4.7kR, Resistance Tolerance=5%, Resistor Type="Thick Film", Supplier Part Number 1=311-4.7KGRCT-ND, Temperature Coefficient=100ppm/°C, Voltage Rating=50V, Case/Package=0603, Category="Chip SMD Resistors", ComponentLink1Description=https://datasheet.ciiva.com/46412/443971-46412858.pdf?src-supplier=Element14, ComponentLink1URL=https://datasheet.ciiva.com/46412/443971-46412858.pdf?src-supplier=Element14, Construction=Rectangular, Depth=0.8mm, Designed by=Hamit, Features="Moisture Resistant", Lead Free="Lead Free", Length=1.6mm, Manufacturer Part Number=RC0603JR-074K7L, Military Standard=Not, Number of Pins=2, Number of Terminations=2, Packaging="Tape and Reel", Power Rating=100mW, Pricing 1="1=0,10000, 10=0,02000, 100=0,00800, 1000=0,00360, 2500=0,00312 (USD)", REACH SVHC="No SVHC", RoHS=Yes, RoHS Compliant=Yes, Series=RC, Size Code=0603, Stock 1=321494, Supplier 1=Digi-Key, Termination=SMD/SMT, Tolerance=5%, Voltage Rating (DC)=50V, Width=0.8mm
R6 R8 R9 R10 R11: library part "RES 0 ohm 0603", "RES SMD 0 OHM JUMPER 1/10W 0603", Case Code (Metric)=1608, Case Code (Imperial)=0603, Manufacturer=Yageo, Max Operating Temperature=155°C, Max Power Dissipation=100mW, Min Operating Temperature=-55°C, Package Quantity=5000, Resistance=0mR, Resistance Tolerance=5%, Resistor Type="Thick Film", Supplier Part Number 1=311-0.0GRDKR-ND, Temperature Coefficient=200ppm/°C, Tolerance=1%, Voltage Rating=50V, Case/Package=0603, Category="Chip SMD Resistors", Construction=Rectangular, Contact Plating=Tin,Matte, Depth=0.8mm, Designed by=Hamit, Features="Moisture Resistant", Height=0.45mm, Lead Free="Lead Free", Length=1.6mm, Manufacturer Part Number=RC0603JR-070RL, Military Standard=Not, Number of Pins=2, Number of Terminations=2, Packaging="Tape and Reel", Power Rating=100mW, Pricing 1="1=0,10000, 10=0,01700, 25=0,01240, 50=0,00940, 100=0,00700, 250=0,00532, 500=0,00424, 1000=0,00313 (USD)", Radiation Hardening=No, REACH SVHC="No SVHC", RoHS=Yes, RoHS Compliant=Yes, Series=RC, Size Code=0603, Stock 1=6474034, Supplier 1=Digi-Key, Technology="THICK FILM", Termination=SMD/SMT, Voltage Rating (DC)=50V, Width=0.8mm
R7 R12: "Res General Purpose Thick Film 0603 10K Ohm 1% 1/10W ±100ppm/°C Molded SMD Paper T/R", Case Code (Metric)=1608, Case Code (Imperial)=0603, Manufacturer=Yageo, Manufacturer Part Number=RC0603FR-0710KL, Max Operating Temperature=155°C, Max Power Dissipation=100mW, Min Operating Temperature=-55°C, Resistance=10kR, Resistance Tolerance=1%, Resistor Type="Thick Film", Supplier Part Number 1=311-10.0KHRCT-ND, Temperature Coefficient=100ppm/°C, Voltage Rating=75V, Voltage Rating (DC)=50V, Case/Package=0603, Category="Chip SMD Resistors", ComponentLink1Description=https://datasheet.ciiva.com/7660/38590-7660789.pdf?src-supplier=Element14, ComponentLink1URL=https://datasheet.ciiva.com/7660/38590-7660789.pdf?src-supplier=Element14, ComponentLink2Description=https://datasheet.ciiva.com/7983/443971-7983596.pdf?src-supplier=Element14, ComponentLink2URL=https://datasheet.ciiva.com/7983/443971-7983596.pdf?src-supplier=Element14, ComponentLink3Description=https://datasheet.ciiva.com/22747/443971-22747519.pdf?src-supplier=Element14, ComponentLink3URL=https://datasheet.ciiva.com/22747/443971-22747519.pdf?src-supplier=Element14, ComponentLink4Description=https://datasheet.ciiva.com/46440/1868787-46440891.pdf?src-supplier=Element14, ComponentLink4URL=https://datasheet.ciiva.com/46440/1868787-46440891.pdf?src-supplier=Element14, ComponentLink5Description=https://datasheet.ciiva.com/7746/1738695-7746239.pdf?src-supplier=Element14, ComponentLink5URL=https://datasheet.ciiva.com/7746/1738695-7746239.pdf?src-supplier=Element14, ComponentLink6Description=https://datasheet.ciiva.com/15189/getdatasheetpartid-409289-15189591.pdf?src-supplier=Verical, ComponentLink6URL=https://datasheet.ciiva.com/15189/getdatasheetpartid-409289-15189591.pdf?src-supplier=Verical, Construction=Rectangular, Depth=0.8mm, Designed by=Hamit, Features="Moisture Resistant", Height=0.45mm, Lead Free="Lead Free", Lead Pitch=0.3mm, Length=1.6mm, Military Standard=Not, Number of Pins=2, Number of Terminations=2, Packaging="Tape and Reel", Power Rating=100mW, Pricing 1="1=0,10000, 10=0,02400, 100=0,00970, 1000=0,00436, 2500=0,00378 (USD)", REACH SVHC=Unknown, RoHS=Yes, RoHS Compliant=Yes, Series=RC, Size Code=0603, Stock 1=28304153, Supplier 1=Digi-Key, Termination=SMD/SMT, Tolerance=1%, Weight=7.1E-05oz, Width=0.8mm
S1: library part "button 4 pads", "Switch Tactile OFF (ON) SPST Round Button PC Pins 0.05A 24VDC 1.57N Thru-Hole Loose", Actuator Color=Black, Contact Current Rating=50mA, Contact Resistance=100mR, Manufacturer="TE Connectivity Alcoswitch", Max Operating Temperature=85°C, Max Voltage Rating (DC)=24V, Min Operating Temperature=-35°C, Operating Force=160gf, Package Quantity=750, Supplier Part Number 1=450-1650-ND, Actuator Length=0.055inch, Actuator Material=PBT, Actuator Type=Standard, Category="Pushbutton Switches", ComponentLink1Description=https://datasheet.ciiva.com/30199/1825910-6rqpn1825910-6-30199520.pdf?src-supplier=Onlinecomponents.com, ComponentLink1URL=https://datasheet.ciiva.com/30199/1825910-6rqpn1825910-6-30199520.pdf?src-supplier=Onlinecomponents.com, ComponentLink2Description=https://datasheet.ciiva.com/15184/getdatasheetpartid-395915-15184509.pdf?src-supplier=Verical, ComponentLink2URL=https://datasheet.ciiva.com/15184/getdatasheetpartid-395915-15184509.pdf?src-supplier=Verical, Contact Material="Copper Alloy", Contact Plating=Silver, Electrical Life=100000Cycles, ELV=Compliant, Lead Free="Lead Free", Length=5.99mm, Manufacturer Part Number=1825910-6, Max Current Rating=50mA, Mechanical Life=100000Cycles, Mount="Through Hole", Orientation=Straight, Packaging="Loose Piece", Pricing 1="1=0,12000, 10=0,11300, 25=0,10720, 100=0,09750, 250=0,09164, 500=0,08382, 1000=0,07018, 2500=0,06823, 5000=0,06433 (USD)", REACH SVHC=Unknown, RoHS=Yes, RoHS Compliant=Yes, Series=FSMJ, Stock 1=136328, Supplier 1=Digi-Key, Switch Function=Off-Mom, Switch Travel=0.25mm, Termination="PC Pins", Throw Configuration=SPST, Type=Switch, Illumination Type=Non-Illuminated,Illuminated
TP1 TP2 TP3 TP4 TP5 TP6 TP7 TP8 TP9 TP10 TP11 TP12: library part "TEST POINT"
U1: library part "REGULATOR AP7361-33E-13", "LDO Regulator Pos 3.3V 1A 4-Pin(3+Tab) SOT-223 T/R", Case/Package=SOT-223, Dropout Voltage=500mV, Manufacturer=Diodes, Max Operating Temperature=85°C, Max Output Current=1A, Max Power Dissipation=1.1W, Max Input Voltage=6V, Min Current Limit=1.1A, Min Operating Temperature=-40°C, Min Input Voltage=2.2V, Output Voltage=3.3V, Package Quantity=1, Power Dissipation=1.1kW, Power Supply Rejection Ratio (PSRR)=65dB, Quiescent Current=70uA, Reference Voltage=800mV, Supplier Part Number 1=AP7361-33E-13DICT-ND, Accuracy=1%, Category="Voltage Regulators - Linear", ComponentLink1Description=https://datasheet.ciiva.com/26926/getdatasheetpartid-670786-26926141.pdf?src-supplier=Verical, ComponentLink1URL=https://datasheet.ciiva.com/26926/getdatasheetpartid-670786-26926141.pdf?src-supplier=Verical, ComponentLink2Description=https://datasheet.ciiva.com/25651/ap7361-25651049.pdf?src-supplier=Digi-Key, ComponentLink2URL=https://datasheet.ciiva.com/25651/ap7361-25651049.pdf?src-supplier=Digi-Key, ComponentLink3Description=https://datasheet.ciiva.com/29568/ap7361-29568378.pdf?src-supplier=Digi-Key, ComponentLink3URL=https://datasheet.ciiva.com/29568/ap7361-29568378.pdf?src-supplier=Digi-Key, ComponentLink4Description=https://datasheet.ciiva.com/29568/ap7361-29568379.pdf?src-supplier=Digi-Key, ComponentLink4URL=https://datasheet.ciiva.com/29568/ap7361-29568379.pdf?src-supplier=Digi-Key, Contact Plating=Tin,Matte, Designed by=Hamit, Lead Free="Lead Free", Manufacturer Part Number=AP7361-33E-13, Mount="Surface Mount", Number of Outputs=1, Number of Pins=4, Number of Regulators=1, Output Current=1A, Output Type=Fixed, Packaging="Tape and Reel", Polarity=Positive, Pricing 1="1=0,51000, 10=0,41400, 25=0,37840, 100=0,28150, 250=0,25516, 500=0,21116, 1000=0,15836 (USD)", Radiation Hardening=No, REACH SVHC="No SVHC", RoHS=Yes, RoHS Compliant=Yes, Series=-, Supplier 1=Digi-Key, Weight=0.000282oz
U2: "Ultra-low-power ARM Cortex-M3 MCU with 512 Kbytes Flash, 32 MHz CPU, USB, 2xOp-amp", Case/Package=LQFP, Frequency=32MHz, Manufacturer=STMicroelectronics, Max Operating Temperature=85°C, Max Power Dissipation=435mW, Max Supply Voltage=3.6V, Min Operating Temperature=-40°C, Min Supply Voltage=1.8V, Package Quantity=160, Supplier Part Number 1=1962078, Category=Microcontrollers, ComponentLink1Description=https://datasheet.ciiva.com/48492/dm00098321-48492415.pdf?src-supplier=Avnet, ComponentLink1URL=https://datasheet.ciiva.com/48492/dm00098321-48492415.pdf?src-supplier=Avnet, Core Architecture=ARM, Data Bus Width=32b, Manufacturer Part Number=STM32L152RET6, Max Frequency=32MHz, Memory Size=512KB, Memory Type=FLASH, Number of ADC Channels=21, Number of Pins=64, Number of Programmable I/O=51, Number of Timers/Counters=9, Number of I/Os=51, Oscillator Type=Internal, Packaging=Tray, Peripherals="Brown-out Detect/Reset,POR,PWM,WDT,DMA,LCD", Pricing 1="160=6,32900 (GBP)", RAM Size=80KB, REACH SVHC="No SVHC", RoHS=Yes, RoHS Compliant=Yes, Stock 1=10, Supplier 1=RSComponents, Watchdog Timer=Yes, Weight=0.012088oz, Interface=I2C,SPI,USB,IrDA,UART,USART,LIN,I2S
X1: library part "CRYSTAL 16MHZ 20PF SMD", "CRYSTAL 16.0000MHZ 20PF SMD", Case/Package=SMD/SMT, ESR (Equivalent Series Resistance)=50R, Frequency=16MHz, Frequency Stability=50ppm, Frequency Tolerance=30ppm, Load Capacitance=20pF, Manufacturer="ECS International", Max Operating Temperature=70°C, Min Operating Temperature=-20°C, Package Quantity=1, Supplier Part Number 1=XC1120CT-ND, Category=Crystals, ComponentLink1Description=https://datasheet.ciiva.com/853/ecx-53b-853408.pdf?src-supplier=Digi-Key, ComponentLink1URL=https://datasheet.ciiva.com/853/ecx-53b-853408.pdf?src-supplier=Digi-Key, ComponentLink2Description=https://datasheet.ciiva.com/853/ecx-53b-853406.pdf?src-supplier=Digi-Key, ComponentLink2URL=https://datasheet.ciiva.com/853/ecx-53b-853406.pdf?src-supplier=Digi-Key, ComponentLink3Description=https://datasheet.ciiva.com/853/ecx-53b-853407.pdf?src-supplier=Digi-Key, ComponentLink3URL=https://datasheet.ciiva.com/853/ecx-53b-853407.pdf?src-supplier=Digi-Key, Designed by=Hamit, Height=0.033inch, Lead Free="Lead Free", Length=0.197inch, Manufacturer Part Number=ECS-160-20-30B-TR, Mount="Surface Mount", Packaging="Tape and Reel", Pricing 1="1=1,33000, 10=1,26800, 50=1,23900, 100=1,06200, 500=1,03250 (USD)", RoHS=Yes, RoHS Compliant=Yes, Series=ECX-53B, Stock 1=5789, Supplier 1=Digi-Key, Termination=SMD/SMT, Tolerance=50ppm, Width=0.126inch

## Via types
v1: diameter 0.55, hole 0.35, Top Layer to Bottom Layer, tented both sides, 53 vias
v2: diameter 0.45, hole 0.25, Top Layer to Bottom Layer, tented both sides, 47 vias
v3: diameter 0.5, hole 0.3, Top Layer to Bottom Layer, tented both sides, 1 vias

## Nets (pads, with @x,y where several pads share a name; then routed paths per layer and width w, separated by ;. In a path a pad name is that pad's centre, name@x,y a point inside that pad or via, vN(x,y) a via of type N, cw(c..) or ccw(c..) an arc to the next point about the centre after c; other vN are vias at no path point)
+3V3: C3.2 C4.2 C6.2 C7.2 C8.2 C9.2 C10.2 C11.2 C12.2 J1.5 J2.1 J5.5 J6.5 J8.1 J9.1 J10.1 J11.1 R1.2 R2.0 R3.0 R4.0 R5.0 TP7.1 U1.3 U2.1 U2.13 U2.19 U2.32 U2.48 U2.64 | length 65.2
  Top Layer w0.305: C6.2 26.54,36.91 U2.19 ; C7.2 26.789,28.2 26.789,28.95 U2.32 ; C12.2 29.65,41.429 29.829,41.25 31.483,41.25 31.662,41.071 31.662,39.837 U2.13 ; U2.48 38.51,28.49 38.8,28.2 C9.2 ; U2.1 37.669,38.088 37.848,37.91 U2.64 39.589,38.839 39.8,39.05 C10.2
  Top Layer w0.4: v2(28.25,42.5) C12.2 29.65,44.65 C8.2 29.75,46 v2(29,46.75) ; C10.2 v2(42.75,41)
  Top Layer w0.5: J2.1 7.45,38.65 R5.0 v2(11.5,40.5) ; R3.0 11.5,28.5 v2(11.854,28.146) ; v2(23.75,26.75) C11.2 23.923,28.2 C7.2 ; v2(25.5,36.75) C6.2 ; J6.5 39.37,59.25 v2(40.25,59.25) R1.2 ; v2(38.75,24.5) 38.8,24.55 C9.2 ; v2(53.35,55.4) R4.0 ; R2.0 56,45.5 56.67,44.83 J8.1
  other v1: 25.5,10.5 26.75,13.75 26.5,15.25 25.25,16.5 26.75,16.75
+5V: C1.2 C2.2 J1.1 J3.1 J4.1 J7.1 J9.2 TP4.1 U1.1 | length 46.2
  Bottom Layer w0.8: v1(29.5,10.5) 29.5,8.469 29.969,8 35,8 37.5,5.5 J3.1 45.21,2.25 55.25,2.25 61.5,8.5 61.5,12.75 60.83,13.42 J9.2
  other v1: 31,10.5 29.5,12 29.5,13.5 29.75,16.25
BOOT0: J10.2 R7.2 | length 3
  Top Layer w0.305: R7.2@48.35,31.25 R7.2@48.5,31.1 ; J10.2 48.55,28.3 R7.2
BOOT1: J11.2 R12.2 | length 3
  Top Layer w0.305: R12.2 20,25.7 J11.2
GND: C1.1 C2.1 C3.1 C4.1 C5.1 C6.1 C7.1 C8.1 C9.1 C10.1 C11.1 C12.1 C13.1 C14.1 J1.3 J1.4 J2.4 J3.2 J4.4 J5.6 J5.7 J5.8 J5.9 J5.10 J6.6 J6.7 J6.8 J6.9 J6.10 J7.5 J8.2 J9.6 J10.3 J11.3 LED1.C S1.3 S1.4 TP5.1 TP11.1 U1.2 U2.12 U2.18 U2.31 U2.47 U2.63 X1.2 X1.4 | length 99.6
  Top Layer w0.254: C12.1 32.351,42.5 32.5,42.351 32.5,41.5 32.169,41.169 32.169,40.008 U2.12@32.177,40
  Top Layer w0.3: 47.04,9 TP11.1
  Top Layer w0.305: C6.1@25.5,39.75 25.75,39.5 26.571,39.5 26.75,39.321 26.75,37.79 27.13,37.41 U2.18 ; C7.1 26.771,29.8 26.771,30.55 27.13,30.91 U2.31 ; U2.47 37.169,25.781 C9.1 ; U2.63 42.71,37.41 C10.1
  Top Layer w0.4: C12.1 31.55,44.55 C8.1 31.35,46.337 31.75,46.736 v2(31.75,46.75)
  Top Layer w0.5: v2(21.823,29.927) C11.1 23.877,29.8 C7.1 ; C6.1@25.5,39.75 v2(25.5,40.75) ; S1.4 S1.3 ; v2(27.5,50) C5.1 ; C14.1 34,43.043 34.293,42.75 v2(34.5,42.75) ; J6.6 36.71,67.04 42.25,61.5 v2(42.25,59.25) LED1.C ; v2(34.5,48.25) 34.55,48.2 X1.4 ; C9.1 37.2,24.55 v2(37.25,24.5) ; v2(39.25,44.25) 39.456,44.25 40.2,44.994 X1.2 ; v2(42.25,42.25) 42.5,42.5 C13.1 ; C10.1 43.7,37.45 44.5,38.25 v2(44.5,38.5)
  Top Layer w1: U1.2@27.5,2.05 43.59,2.05 J3.2 47.04,9 47.04,14.71 45.21,16.54 J1.3 J1.4
  other v1: 21.75,4 23.123,3.98 29.25,4 33.25,4 51.25,5.25 55,5.25 13,6.25 15.25,6.25 17.75,6.25 27.5,6.5 33.25,6.75 51.25,7.5 55,7.5 21.75,7.75 23.25,7.75 10.5,8.5 13,8.5 15.25,8.5 17.75,8.5 33.25,9.5 21.75,10.25 23.25,10.25 34,12 22,14 34,15.25 33,16 51.75,20.25 55.25,29.25 57,41 45.5,43.25 45.5,47 38.5,52.5 45.5,52.5 16.75,55.25 16.75,58.243 45.5,58.75 53,58.75 45.5,61.25 53,61.25 45.5,63.75 53,63.75 45.5,66.25 53,66.25
H1_PC0: J7.4 U2.8 | length 39.2
  Top Layer w0.305: U2.8 34.169,38.581 v2(35.25,37.5)
  Bottom Layer w0.305: J7.4 14.25,22.12 14.25,25.75 20.927,32.427 30.781,32.427 30.797,32.411 32.304,32.411 35.677,35.784 35.677,37.07 35.25,37.498 v2(35.25,37.5)
H1_PC1: J7.10 U2.9 | length 56.8
  Top Layer w0.305: U2.9 33.669,37.331 v2(34.25,36.75)
  Bottom Layer w0.254: 26.5,37.75 28.25,36 30,36 30.75,36.75 v2(34.25,36.75)
  Bottom Layer w0.305: J7.10 6.499,10.75 3.653,13.597 3.653,24.403 16.25,37 24.5,37 25.25,37.75 26.5,37.75
H1_PC2: J7.9 U2.10 | length 50.9
  Top Layer w0.305: U2.10 33.169,36.835 33.347,36.657 v2(33.347,36)
  Bottom Layer w0.254: J7.9 6.499,13.29 4.5,15.289 4.5,24.25 15.821,35.571 31.071,35.571 31.5,36 v2(33.347,36)
H1_PC3: J7.8 U2.11 | length 46.3
  Top Layer w0.305: v2(32,35.25) 32.669,35.919 U2.11
  Bottom Layer w0.254: J7.8 6.499,15.83 5.25,17.079 5.25,23.851 16.399,35 31.749,35 v2@31.999,35.25
H1_PC4: J7.7 U2.24 | length 37.6
  Top Layer w0.254: U2.24 29.619,34.41 29.839,34.19 30.299,34.19 v2(30.337,34.152)
  Bottom Layer w0.305: J7.7 6.499,18.37 6.25,18.619 6.25,23.5 17,34.25 23.605,34.25 23.855,34 27.09,34 27.242,34.152 v2(30.337,34.152)
H1_PC5: J7.6 U2.25 | length 32.7
  Top Layer w0.254: U2.25 29.548,33.91 29.958,33.5 31.219,33.5 v2(31.25,33.531)
  Bottom Layer w0.305: J7.6 7.96,22.53 18.312,32.882 30.632,32.882 31.25,33.5 v2(31.25,33.531)
H1_UART_RX: J7.2 R11.2 | length 4.9
  Top Layer w0.5: J7.2 10.54,13.25 R11.2 R11.2@15.08,13.37
H1_UART_TX: J7.3 R10.2 | length 4.6
  Top Layer w0.5: J7.3 10.67,16 R10.2 R10.2@14.81,15.91
H2_SPI_MISO: J9.8 U2.35 | length 37.5
  Top Layer w0.305: U2.35 31.169,24.12 31.222,24.067 31.222,23.778 v2(31.25,23.75)
  Bottom Layer w0.305: v2(31.25,23.75) 31.25,20 36.5,14.75 55.29,14.75 J9.8 ; J9.8@56.54,15.25 J9.8@57.25,15.96
H2_SPI_MOSI: J9.7 U2.36 | length 33
  Top Layer w0.305: U2.36 31.669,26.62 32,26.289 v2(32,26.25)
  Bottom Layer w0.305: v2(32,26.25) 32,23.75 39,16.75 54.75,16.75 J9.7
H2_SPI_NSS: J9.10 U2.33 | length 44.6
  Top Layer w0.305: v2(28,24.5) 28,25 30.169,27.169 U2.33
  Bottom Layer w0.305: v2(28,24.5) 28,16.25 34.25,10 55.324,10 56.204,10.88 J9.10
H2_SPI_SCK: J9.9 U2.34 | length 41.1
  Top Layer w0.305: v2(29.5,25) 30.669,26.169 U2.34
  Bottom Layer w0.305: v2(29.5,25) 29.5,18 35,12.5 55.324,12.5 56.244,13.42 J9.9 ; J9.9@56.824,13.25 56.994,13.42 J9.9@57.25,13.42
H2_USART_CK: J9.3 U2.41 | length 42.3
  Top Layer w0.305: v2(33,26.5) 33.028,26.528 33.323,26.528 34.169,27.374 U2.41
  Bottom Layer w0.305: v2@33.001,26.5 33.251,26.75 59.25,26.75 62.5,23.5 62.5,18.67 J9.3@59.79,15.96
H2_USART_RX: J9.5 U2.43 | length 30.3
  Top Layer w0.305: v2(35,23.5) 35,26.357 35.162,26.519 35.162,28.482 U2.43
  Bottom Layer w0.305: v2(35,23.5) 57.33,23.5 J9.5@59.415,21.415
H2_USART_TX: J9.4 U2.42 | length 36.7
  Top Layer w0.305: v2(33.75,25.75) 34.669,26.669 U2.42
  Bottom Layer w0.305: v2@33.751,25.75 34.001,25.5 58.5,25.5 61.25,22.75 61.25,19.96 J9.4@59.79,18.5
IMU_SCL: J8.3 R2.1 TP10.1 U2.61 | length 32
  Top Layer w0.305: U2.61 44.607,36.41 44.697,36.5 v3(44.75,36.5) ; v2(50.5,38) 52.75,40.25 52.75,46.7 53.275,47.225 ; TP10.1 52.75,47.75 53.275,47.225 ; J8.3 56.04,49.91 R2.1 53.275,47.225
  Bottom Layer w0.305: v3(44.75,36.5) 48.961,36.5 50.461,38 v2(50.5,38)
IMU_SDA: J8.4 R4.1 TP12.1 U2.59 | length 36.3
  Top Layer w0.305: U2.59 46.41,35.41 46.75,35.75 46.75,39.25 49.5,42 49.5,49.25 50.5,50.25 ; TP12.1@50,51 TP12.1 50.5,50.25 ; J8.4 56.05,52.45 R4.1 52.75,52.5 50.5,50.25
ISIK_1: J5.1 U2.27 | length 25.1
  Top Layer w0.305: J5.1 9.29,46.71 19.75,36.25 21.75,36.25 24.25,33.75 26,33.75 26.84,32.91 U2.27
ISIK_2: J6.1 U2.26 | length 41.3
  Top Layer w0.305: v2(21.5,52.5) 21.5,62.04 J6.1 ; U2.26 29.368,33.41 29.913,32.865 30.701,32.865 30.712,32.853 32.071,32.853 32.25,33.032 32.25,34 30.221,36.029 30.221,36.529 v2(29.75,37)
  Bottom Layer w0.305: v2(21.5,52.5) 21.5,47 28.75,39.75 28.75,37.961 29.711,37 v2(29.75,37)
MCU_BOOT0: R7.1 U2.60 | length 15.7
  Top Layer w0.305: v2(37,35.5) 37.037,35.5 37.447,35.91 U2.60@39.007,35.91 ; v2(44.7,31) R7.1
  Bottom Layer w0.305: v2(37,35.5) 37.603,34.897 43.675,34.897 44.5,34.071 44.5,32 44.672,31.828 44.672,31.028 v2(44.7,31)
MCU_BOOT1: R12.1 U2.28 | length 15.4
  Top Layer w0.305: v2(21.5,27.75) 21.5,27.711 21.55,27.661 R12.1 ; U2.28 28.257,32.402 29.348,32.402 v2(30.5,31.25)
  Bottom Layer w0.305: v2(21.5,27.75) 21.751,27.5 23.75,27.5 27.5,31.25 v2(30.5,31.25)
MCU_JETSON_RX: J4.2 R9.2 TP8.1 | length 6.2
  Top Layer w0.254: R9.2 57.05,35.75 58.5,35.75 ; TP8.1 58.5,35.75 ; J4.2 58.5,35.75
MCU_JETSON_TX: J4.3 R8.2 TP9.1 | length 6.3
  Top Layer w0.254: R8.2 57.01,33.21 58.25,33.21 J4.3 ; TP9.1 58.5,33.21
MCU_SWCLK: J1.6 TP2.1 U2.49 | length 15.2
  Top Layer w0.305: U2.49 39.589,29.411 40.25,28.75 40.25,28 44.25,24 47.571,24 47.75,23.821 ; J1.6 47.75,23.821 ; TP2.1 47.87,23.87 47.799,23.87 47.75,23.821
MCU_SWDIO: J1.2 TP1.1 U2.46 | length 14.1
  Top Layer w0.305: U2.46 36.669,27.215 36.205,26.75 36.179,26.75 36,26.571 36,23 37.5,21.5 38.25,21.5 ; TP1.1 38.25,21.5 ; J1.2 42.63,21.5 38.25,21.5
MOTOR_1: J5.2 U2.23 | length 25.1
  Top Layer w0.305: J5.2 9.389,49.531 10.719,49.531 25.348,34.902 28.242,34.902 U2.23
MOTOR_2: J5.3 U2.22 | length 27.6
  Top Layer w0.305: J5.3 12.08,52.17 23.75,40.5 23.75,37.542 25.542,35.75 26,35.75 26.34,35.41 U2.22
MOTOR_3: J5.4 U2.17 | length 27
  Top Layer w0.305: J5.4 13.364,54.71 28.25,39.824 28.25,39.25 U2.17
MOTOR_4: J6.2 U2.16 | length 28.2
  Top Layer w0.305: J6.2 26.5,61.5 24.5,59.5 24.5,47.75 26.75,45.5 26.75,42.652 29.573,39.83 U2.16
MOTOR_5: J6.3 U2.15 | length 33.7
  Top Layer w0.305: v2(30.427,37.677) 30.441,37.691 30.441,38.283 30.669,38.512 U2.15
  Bottom Layer w0.305: J6.3 29.04,62.54 24.5,58 24.5,48 30.75,41.75 30.75,38.512 30.455,38.217 30.455,37.705 v2(30.427,37.677)
MOTOR_6: J6.4 U2.14 | length 31.4
  Top Layer w0.305: U2.14 31.177,39.822 31.177,38.573 31.75,38 v2(31.75,37.5)
  Bottom Layer w0.305: J6.4 31.58,60.33 30.5,59.25 30.5,44.75 32.75,42.5 32.75,38.5 v2(31.75,37.5)
NetC13_2: C13.2 U2.5 X1.3 | length 14.5
  Top Layer w0.254: U2.5 35.669,41.021 35.899,41.25 38.05,41.25 C13.2 42.5,47.75 42.05,48.2 X1.3
NetC14_2: C14.2 R6.1 X1.1 | length 6.7
  Top Layer w0.4: R6.1 36.5,43.05 36.5,43.775 36.275,44 35.7,44 C14.2 36.2,45.7 X1.1
NetLED1_A: LED1.A R1.1 | length 2.1
  Top Layer w0.381: R1.1 40.377,55.773 LED1.A
NetR6_2: R6.2 U2.6 | length 5.3
  Top Layer w0.305: U2.6 35.169,41.741 35.429,42 37.05,42 R6.2
NRST: C5.2 S1.1 S1.2 U2.7 | length 21.1
  Top Layer w0.305: C5.2 30.85,49.225 32.756,47.32 32.756,42.851 34.662,40.945 34.662,39.837 U2.7
  Top Layer w0.5: S1.2 30.478,52.58 30.664,52.58 30.85,52.58 S1.1 ; 30.25,52.58 30.25,51.5 30.761,50.989 30.761,50.089 C5.2
PRESSURE_SCL: J2.2 R5.1 TP3.1 U2.29 | length 23.7
  Top Layer w0.305: J2.2 11.42,35.83 R5.1 13.75,35.75 15,34.5 16.75,34.5 ; TP3.1 16.75,34.5 ; U2.29 26.34,31.91 25.75,32.5 23.237,32.5 21.237,34.5 16.75,34.5
PRESSURE_SDA: J2.3 R3.1 TP6.1 U2.30 | length 22.8
  Top Layer w0.254: TP6.1 17.5,31.402
  Top Layer w0.305: R3.1 12.8,33.2 14.598,31.402 17.5,31.402 28.242,31.402 U2.30
  Top Layer w0.5: J2.3 11.41,33.29 R3.1
UART4_RX: R11.1 U2.52 | length 41.4
  Top Layer w0.305: R11.1 18.25,13.25 23.25,18.25 v2(24.5,18.25) ; U2.52 42.59,31.91 v2(43.25,31.25)
  Bottom Layer w0.305: v2(24.5,18.25) 24.5,24.25 30.5,30.25 32.25,30.25 33.25,31.25 v2(43.25,31.25)
UART4_TX: R10.1 U2.51 | length 37
  Top Layer w0.305: R10.1 18,16 22,20 25.75,20 v2(26.25,20.5) ; U2.51 41.34,31.41 v2(42.25,30.5)
  Bottom Layer w0.305: v2(26.25,20.5) 26.25,24.25 30.5,28.5 40.25,28.5 v2(42.25,30.5)
UART5_RX: R9.1 U2.54 | length 16.7
  Top Layer w0.305: U2.54 39.597,32.902 41.152,32.902 42,33.75 48.25,33.75 50,35.5 R9.1
UART5_TX: R8.1 U2.53 | length 15.9
  Top Layer w0.305: U2.53 50.91,32.41 51.5,33 R8.1
pads on no net: J8.5 J8.6 J8.7 J8.8 MH1.1 MH2.1 MH3.1 MH4.1 U2.2 U2.3 U2.4 U2.20 U2.21 U2.37 U2.38 U2.39 U2.40 U2.44 U2.45 U2.50 U2.55 U2.56 U2.57 U2.58 U2.62

## Polygon pours and split planes (outlines as drawn)
GND on Top Layer "GND_L01_P010" (solid, remove dead copper, pour order 10): 64,70.25 4.113,70.25 1,67.137 1,4 4.363,0.637 64.137,0.637 67.5,4 67.5,66.75
+5V on Top Layer "+5V_L01_P004" (solid, pour order 4): 41.5,19.5 42,20 43.5,20 43.75,19.75 43.75,4.75 42.75,3.75 40.5,3.75 39.75,4.5 39.75,19 40.75,20 42.25,20